# EAGLE board Parallel CS V4.Multiple.Sources (EAGLE 7.2.0)
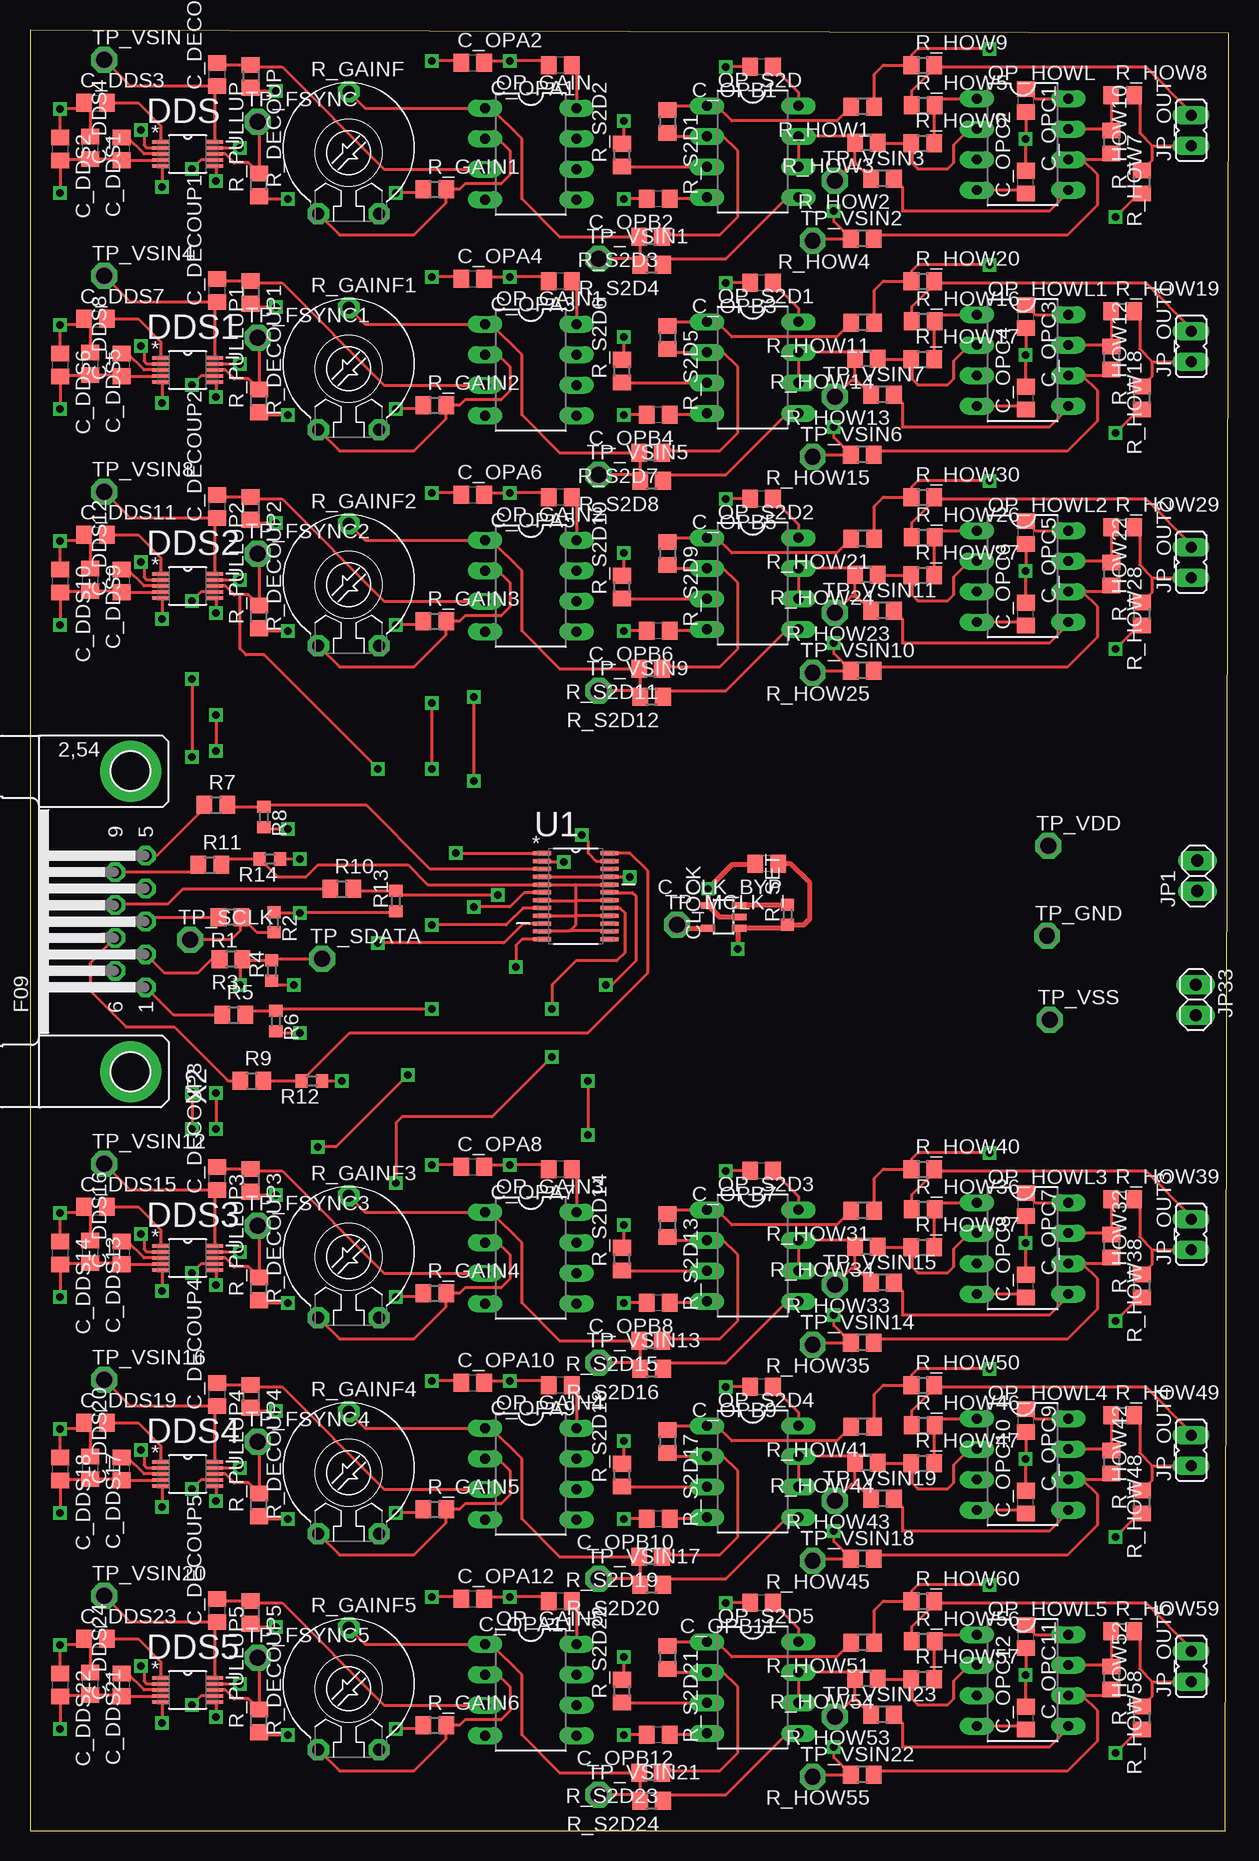
[diagram p0: board, top side]
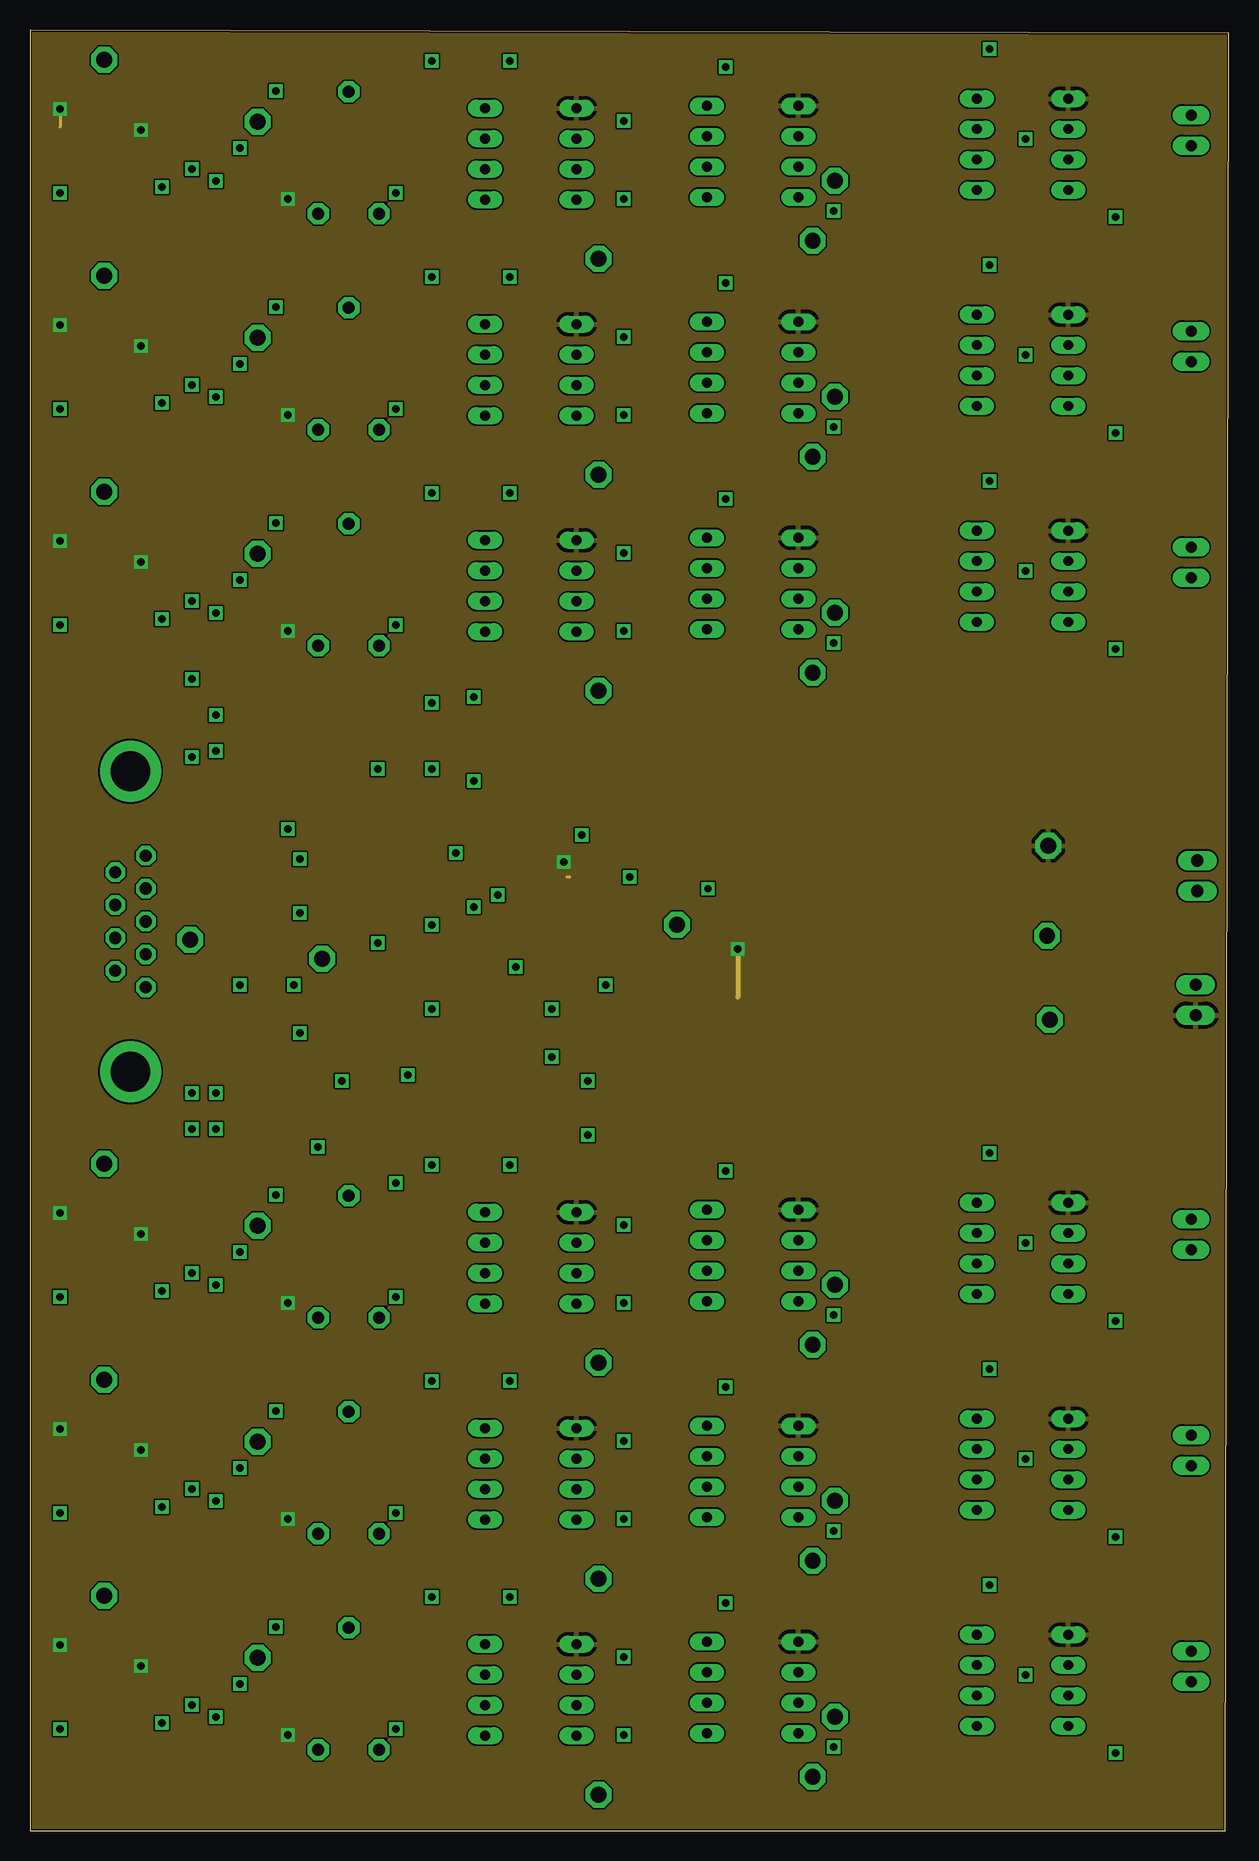
[diagram p1: board, inner layer VDD]
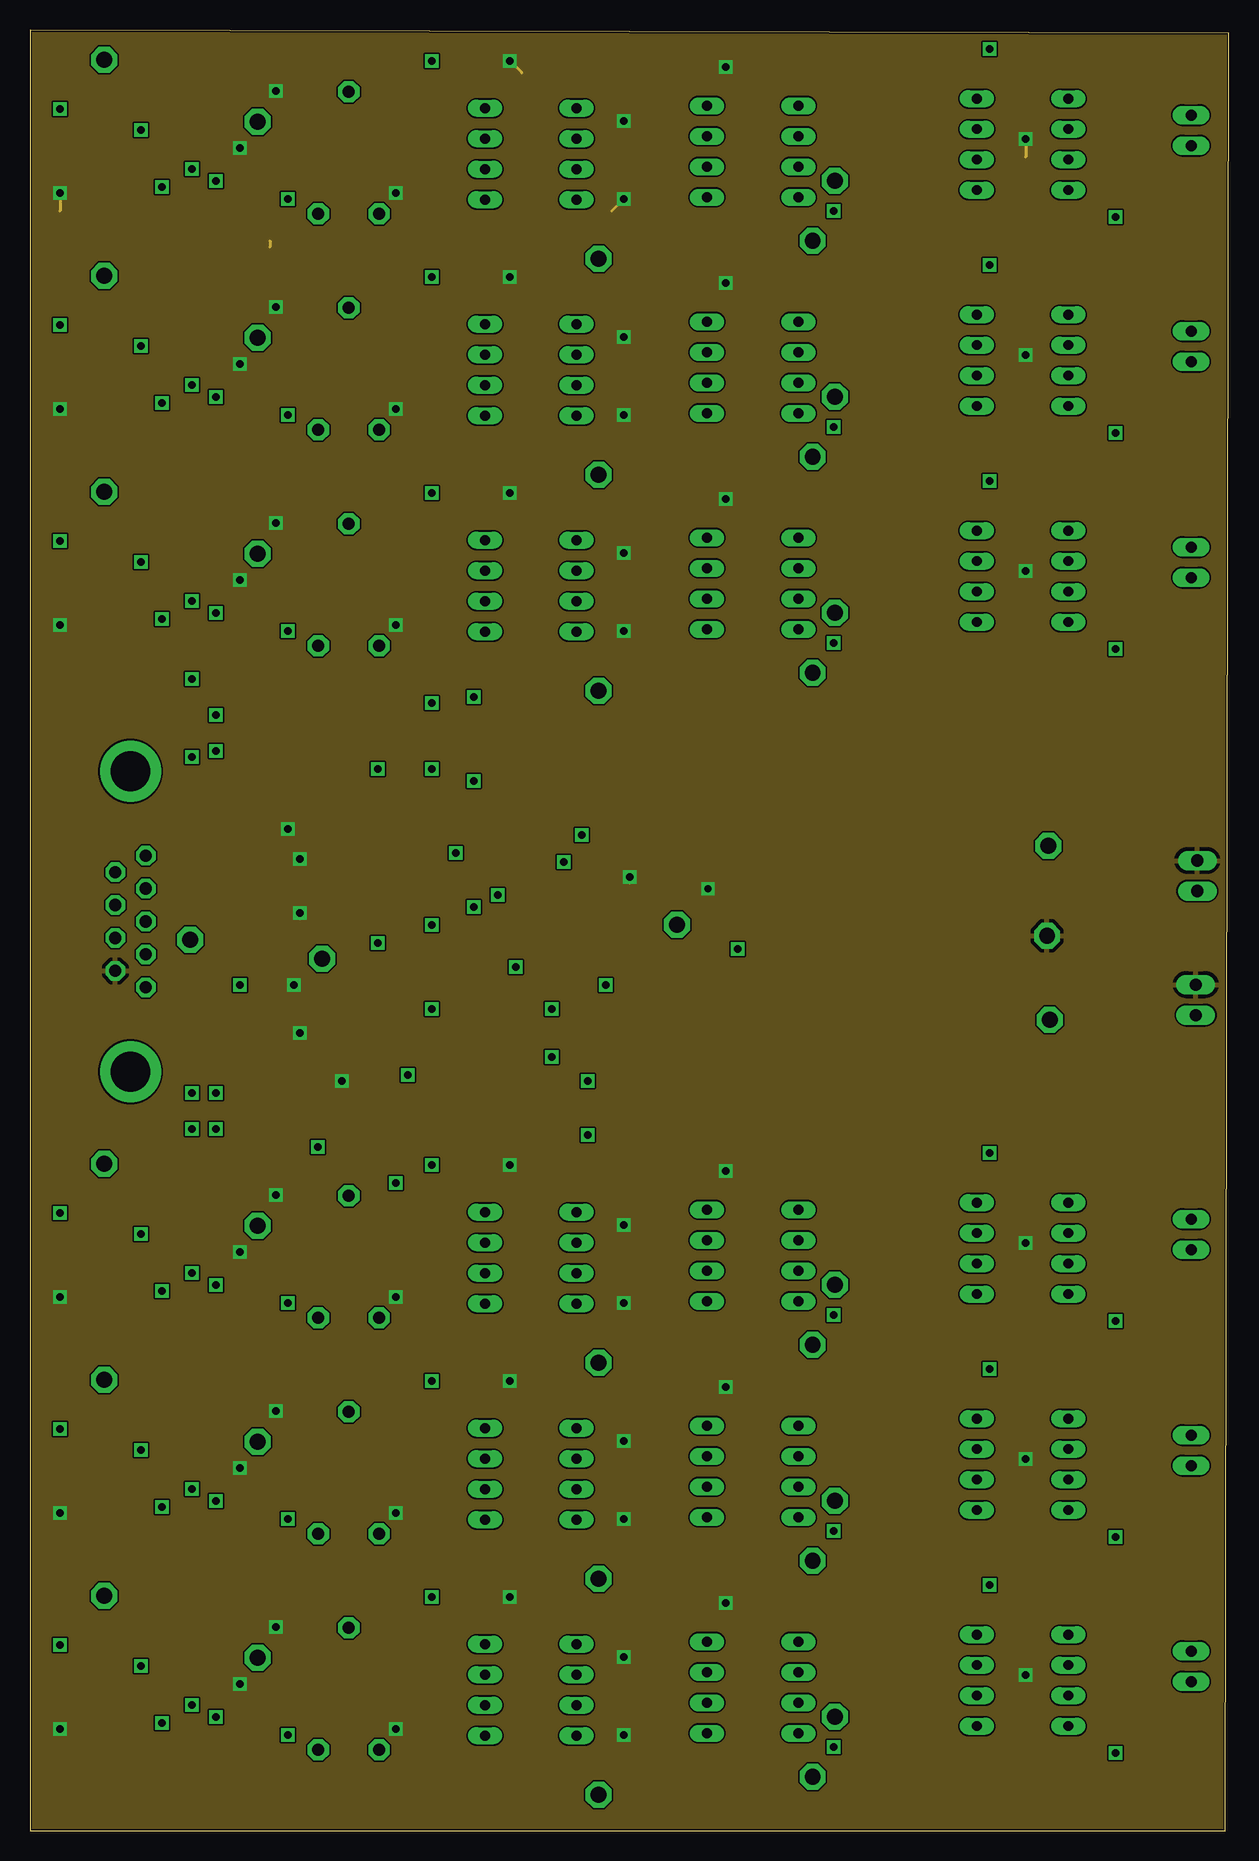
[diagram p2: board, inner layer GND]
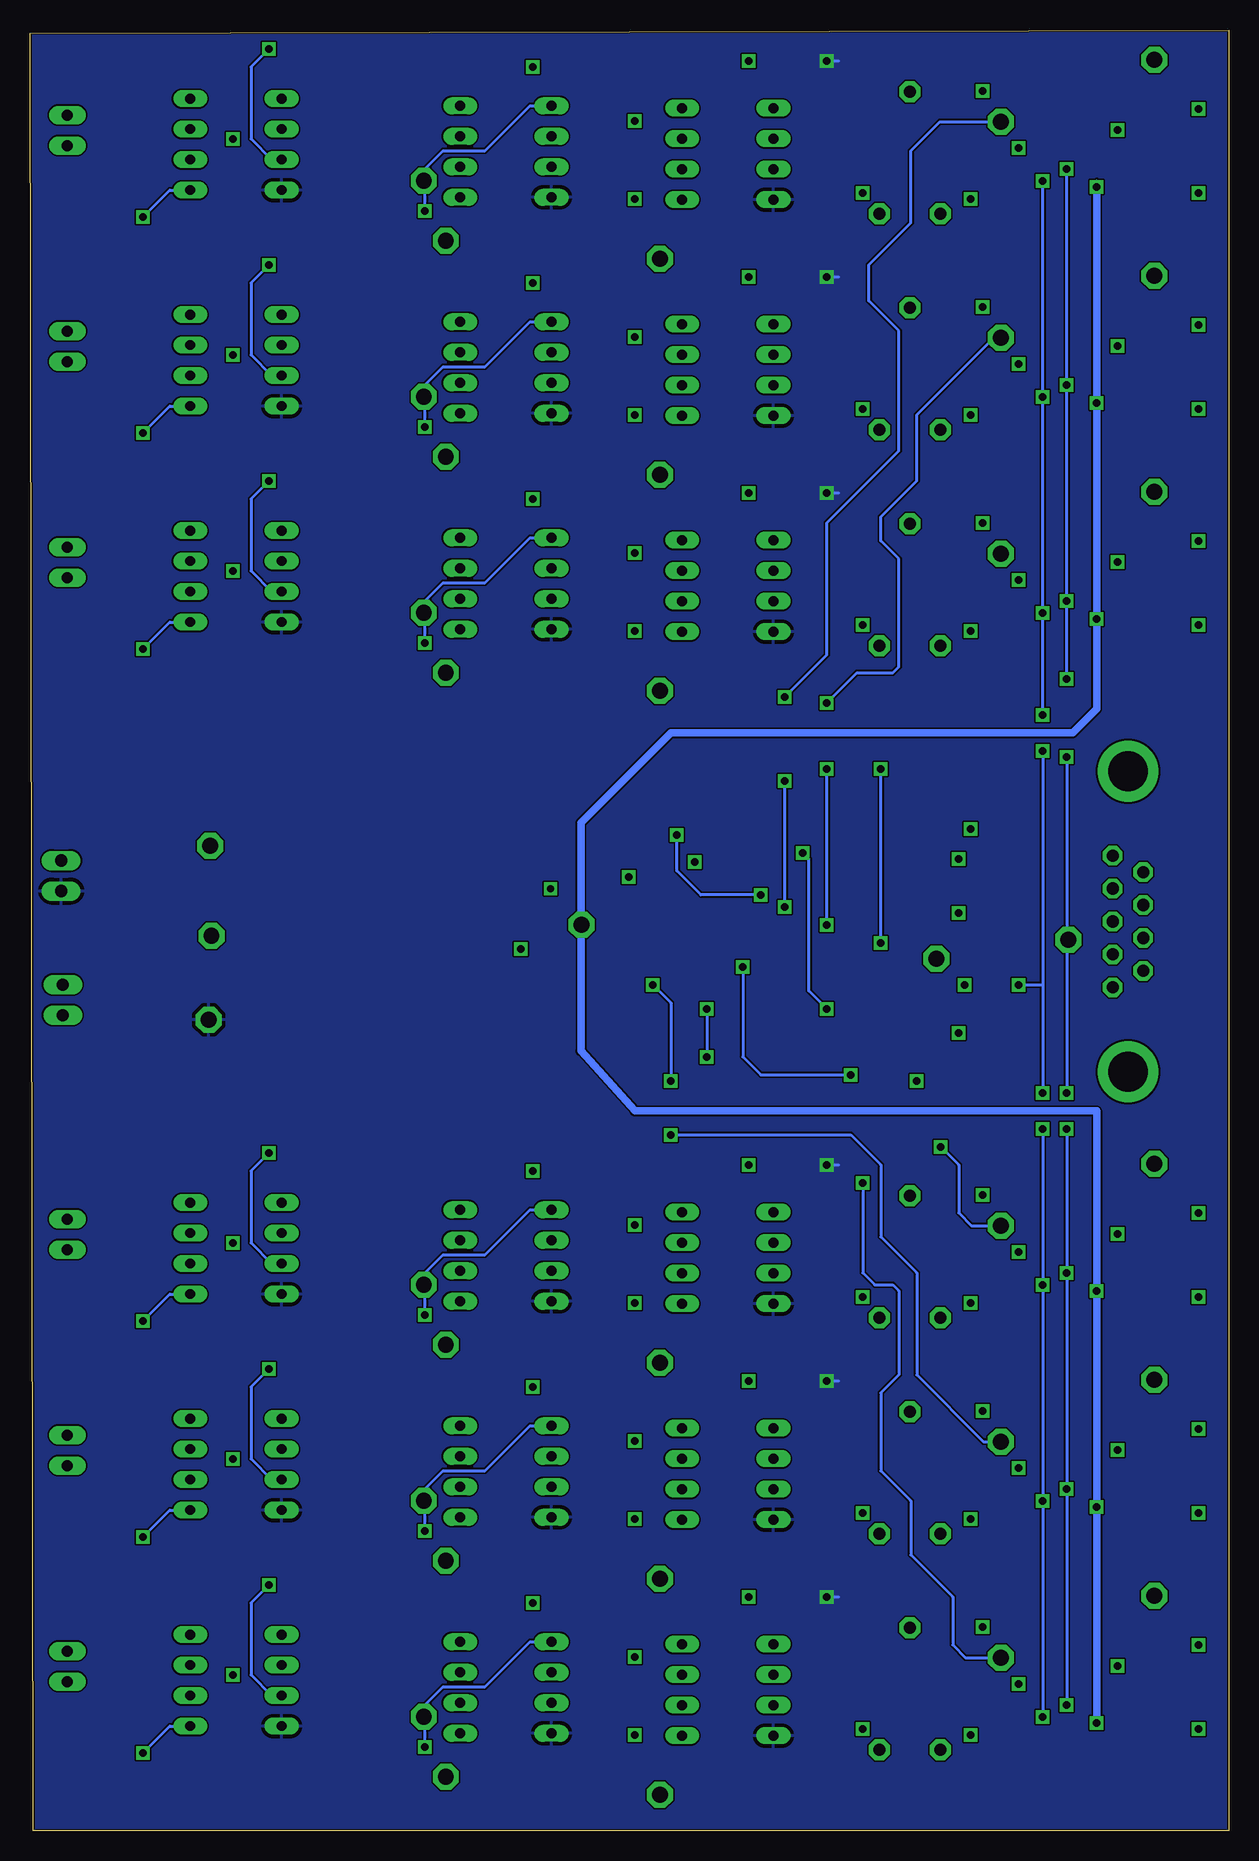
[diagram p3: board, bottom side, seen from below]

Size 99.92 x 150.08 mm. Coordinates in mm from the lower left corner, seen from the top.
Outline: 0,0 99.65,0 99.92,149.81 0,150.08 0,0
Copper layers (1*2*15*16): Top 0.035mm / dielectric 1.5mm / VDD 0.035mm / dielectric 0.15mm / GND 0.035mm / dielectric 0.2mm / Bottom 0.035mm
Design rules "SparkFun-4-layer": minimum track width 6mil, minimum drill 13mil, track to track 6mil, track to pad 6mil, pad to pad 6mil, via to via 6mil, smd to smd 6mil, copper to edge 6mil, drill to drill 8mil, minimum pad ring 12mil, minimum via ring 10mil, stop-mask expansion 4mil, vias tented up to drill 20mil, thermal gap 12mil

## Footprints (pad centres in the part's own frame; a part is rotated, then mirrored left to right if it is on the bottom)
C0805 = smd 1.3 x 1.5: 1 -0.95,0; 2 0.95,0
SOT23-5L = smd 0.55 x 1.2: 1 -0.95,-1.3; 2 0,-1.3; 3 0.95,-1.3; 4 0.95,1.3; 5 -0.95,1.3
SOP50P490X110-10N = smd 1.422 x 0.305: 1 -2.235,0.991; 2 -2.235,0.508; 3 -2.235,0; 4 -2.235,-0.508; 5 -2.235,-0.991; 6 2.235,-0.991; 7 2.235,-0.508; 8 2.235,0; 9 2.235,0.508; 10 2.235,0.991
1X02 = drill 1.016 long: 1 -1.27,0; 2 1.27,0
JP1 = drill 0.914 long: 1 0,-1.27; 2 0,1.27
DIL08 = drill 0.813 long: 1 -3.81,-3.81; 2 -1.27,-3.81; 3 1.27,-3.81; 4 3.81,-3.81; 5 3.81,3.81; 6 1.27,3.81; 7 -1.27,3.81; 8 -3.81,3.81
R0805 = smd 1.3 x 1.5: 1 -0.95,0; 2 0.95,0
R0603 = smd 1 x 1.1: 1 -0.85,0; 2 0.85,0
PT-10 = drill 1.016 pad 1.778 octagon: 1 -2.54,-5.08; 2 2.54,-5.08; 3 0,5.08
P1-13 = drill 1.321 pad 2.159 octagon: TP 0,0
SOP65P640X120-24N = smd 1.473 x 0.356: 1 -2.819,3.581; 2 -2.819,2.921; 3 -2.819,2.286; 4 -2.819,1.626; 5 -2.819,0.965; 6 -2.819,0.33; 7 -2.819,-0.33; 8 -2.819,-0.965; 9 -2.819,-1.626; 10 -2.819,-2.286; 11 -2.819,-2.921; 12 -2.819,-3.581; 13 2.819,-3.581; 14 2.819,-2.921; 15 2.819,-2.286; 16 2.819,-1.626; 17 2.819,-0.965; 18 2.819,-0.33; 19 2.819,0.33; 20 2.819,0.965; 21 2.819,1.626; 22 2.819,2.286; 23 2.819,2.921; 24 2.819,3.581
F09HP = drill 1.016 octagon: 1 -5.486,-1.27; 2 -2.743,-1.27; 3 0,-1.27; 4 2.743,-1.27; 5 5.486,-1.27; 6 -4.115,1.27; 7 -1.372,1.27; 8 1.372,1.27; 9 4.115,1.27 | drill 3.302 pad 5.08: G1 -12.522,0; G2 12.522,0

## Placement (x,y rotation side)
C_CLK_BYP  0.1u  [C0805]  61.42,80.59 180 top
C_DDS1  0.1u  [C0805]  5,140.27 270 top
C_DDS2  10u  [C0805]  2.5,140.16 270 top
C_DDS3  10n  [C0805]  5.45,144 0 top
C_DDS4  100n  [C0805]  7.65,140.18 90 top
C_DDS5  0.1u  [C0805]  5,122.27 270 top
C_DDS6  10u  [C0805]  2.5,122.16 270 top
C_DDS7  10n  [C0805]  5.45,126 0 top
C_DDS8  100n  [C0805]  7.65,122.18 90 top
C_DDS9  0.1u  [C0805]  5,104.27 270 top
C_DDS10  10u  [C0805]  2.5,104.16 270 top
C_DDS11  10n  [C0805]  5.45,108 0 top
C_DDS12  100n  [C0805]  7.65,104.18 90 top
C_DDS13  0.1u  [C0805]  5,48.27 270 top
C_DDS14  10u  [C0805]  2.5,48.16 270 top
C_DDS15  10n  [C0805]  5.45,52 0 top
C_DDS16  100n  [C0805]  7.65,48.18 90 top
C_DDS17  0.1u  [C0805]  5,30.27 270 top
C_DDS18  10u  [C0805]  2.5,30.16 270 top
C_DDS19  10n  [C0805]  5.45,34 0 top
C_DDS20  100n  [C0805]  7.65,30.18 90 top
C_DDS21  0.1u  [C0805]  5,12.27 270 top
C_DDS22  10u  [C0805]  2.5,12.16 270 top
C_DDS23  10n  [C0805]  5.45,16 0 top
C_DDS24  100n  [C0805]  7.65,12.18 90 top
C_DECOUP  1u  [C0805]  15.59,146.38 90 top
C_DECOUP1  1u  [C0805]  15.59,128.38 90 top
C_DECOUP2  1u  [C0805]  15.59,110.38 90 top
C_DECOUP3  1u  [C0805]  15.59,54.38 90 top
C_DECOUP4  1u  [C0805]  15.59,36.38 90 top
C_DECOUP5  1u  [C0805]  15.59,18.38 90 top
C_OPA1  0.1u  [C0805]  44.21,147.15 180 top
C_OPA2  0.1u  [C0805]  36.9,147.35 0 top
C_OPA3  0.1u  [C0805]  44.21,129.15 180 top
C_OPA4  0.1u  [C0805]  36.9,129.35 0 top
C_OPA5  0.1u  [C0805]  44.21,111.15 180 top
C_OPA6  0.1u  [C0805]  36.9,111.35 0 top
C_OPA7  0.1u  [C0805]  44.21,55.15 180 top
C_OPA8  0.1u  [C0805]  36.9,55.35 0 top
C_OPA9  0.1u  [C0805]  44.21,37.15 180 top
C_OPA10  0.1u  [C0805]  36.9,37.35 0 top
C_OPA11  0.1u  [C0805]  44.21,19.15 180 top
C_OPA12  0.1u  [C0805]  36.9,19.35 0 top
C_OPB1  0.1u  [C0805]  60.99,147 180 top
C_OPB2  0.1u  [C0805]  52.38,136 180 top
C_OPB3  0.1u  [C0805]  60.99,129 180 top
C_OPB4  0.1u  [C0805]  52.38,118 180 top
C_OPB5  0.1u  [C0805]  60.99,111 180 top
C_OPB6  0.1u  [C0805]  52.38,100 180 top
C_OPB7  0.1u  [C0805]  60.99,55 180 top
C_OPB8  0.1u  [C0805]  52.38,44 180 top
C_OPB9  0.1u  [C0805]  60.99,37 180 top
C_OPB10  0.1u  [C0805]  52.38,26 180 top
C_OPB11  0.1u  [C0805]  60.99,19 180 top
C_OPB12  0.1u  [C0805]  52.38,8 180 top
C_OPC1  0.1u  [C0805]  83,144.21 270 top
C_OPC2  0.1u  [C0805]  83,137.4 90 top
C_OPC3  0.1u  [C0805]  83,126.21 270 top
C_OPC4  0.1u  [C0805]  83,119.4 90 top
C_OPC5  0.1u  [C0805]  83,108.21 270 top
C_OPC6  0.1u  [C0805]  83,101.4 90 top
C_OPC7  0.1u  [C0805]  83,52.21 270 top
C_OPC8  0.1u  [C0805]  83,45.4 90 top
C_OPC9  0.1u  [C0805]  83,34.21 270 top
C_OPC10  0.1u  [C0805]  83,27.4 90 top
C_OPC11  0.1u  [C0805]  83,16.21 270 top
C_OPC12  0.1u  [C0805]  83,9.4 90 top
CLOCK  LTC69000  [SOT23-5L]  57.82,76.18 90 top
DDS  AD9833BRMZ  [SOP50P490X110-10N]  13.15,139.75 0 top
DDS1  AD9833BRMZ  [SOP50P490X110-10N]  13.15,121.75 0 top
DDS2  AD9833BRMZ  [SOP50P490X110-10N]  13.15,103.75 0 top
DDS3  AD9833BRMZ  [SOP50P490X110-10N]  13.15,47.75 0 top
DDS4  AD9833BRMZ  [SOP50P490X110-10N]  13.15,29.75 0 top
DDS5  AD9833BRMZ  [SOP50P490X110-10N]  13.15,11.75 0 top
JP1  PWR  [1X02]  97.32,79.6 90 top
JP33  PWR  [1X02]  97.18,69.25 270 top
JP_OUT  [JP1]  96.8,141.71 0 top
JP_OUT1  [JP1]  96.8,123.71 0 top
JP_OUT2  [JP1]  96.8,105.71 0 top
JP_OUT3  [JP1]  96.8,49.71 0 top
JP_OUT4  [JP1]  96.8,31.71 0 top
JP_OUT5  [JP1]  96.8,13.71 0 top
OP_GAIN  RC4560  [DIL08]  41.75,139.75 270 top
OP_GAIN1  RC4560  [DIL08]  41.75,121.75 270 top
OP_GAIN2  RC4560  [DIL08]  41.75,103.75 270 top
OP_GAIN3  RC4560  [DIL08]  41.75,47.75 270 top
OP_GAIN4  RC4560  [DIL08]  41.75,29.75 270 top
OP_GAIN5  RC4560  [DIL08]  41.75,11.75 270 top
OP_HOWL  RC4560  [DIL08]  82.75,140.55 270 top
OP_HOWL1  RC4560  [DIL08]  82.75,122.55 270 top
OP_HOWL2  RC4560  [DIL08]  82.75,104.55 270 top
OP_HOWL3  RC4560  [DIL08]  82.75,48.55 270 top
OP_HOWL4  RC4560  [DIL08]  82.75,30.55 270 top
OP_HOWL5  RC4560  [DIL08]  82.75,12.55 270 top
OP_S2D  RC4560  [DIL08]  60.25,139.95 270 top
OP_S2D1  RC4560  [DIL08]  60.25,121.95 270 top
OP_S2D2  RC4560  [DIL08]  60.25,103.95 270 top
OP_S2D3  RC4560  [DIL08]  60.25,47.95 270 top
OP_S2D4  RC4560  [DIL08]  60.25,29.95 270 top
OP_S2D5  RC4560  [DIL08]  60.25,11.95 270 top
R1  10k  [R0805]  16.68,76.15 180 top
R2  20k  [R0603]  20.35,75.73 270 top
R3  10k  [R0805]  16.76,72.65 180 top
R4  20k  [R0603]  20.15,71.69 90 top
R5  10k  [R0805]  17,68 0 top
R6  20k  [R0603]  20.5,67.5 270 top
R7  10k  [R0805]  15.5,85.5 0 top
R8  20k  [R0603]  19.5,84.5 270 top
R9  10k  [R0805]  18.5,62.5 0 top
R10  10k  [R0805]  26,78.5 0 top
R11  10k  [R0805]  15,80.5 0 top
R12  20k  [R0603]  23.5,62.5 180 top
R13  20k  [R0603]  30.5,77.5 90 top
R14  20k  [R0603]  20,81 180 top
R_DECOUP  10k  [R0805]  18.41,146.22 270 top
R_DECOUP1  10k  [R0805]  18.41,128.22 270 top
R_DECOUP2  10k  [R0805]  18.41,110.22 270 top
R_DECOUP3  10k  [R0805]  18.41,54.22 270 top
R_DECOUP4  10k  [R0805]  18.41,36.22 270 top
R_DECOUP5  10k  [R0805]  18.41,18.22 270 top
R_GAIN1  10k  [R0805]  33.75,136.8 0 top
R_GAIN2  10k  [R0805]  33.75,118.8 0 top
R_GAIN3  10k  [R0805]  33.75,100.8 0 top
R_GAIN4  10k  [R0805]  33.75,44.8 0 top
R_GAIN5  10k  [R0805]  33.75,26.8 0 top
R_GAIN6  10k  [R0805]  33.75,8.8 0 top
R_GAINF  [PT-10]  26.57,139.85 0 top
R_GAINF1  [PT-10]  26.57,121.85 0 top
R_GAINF2  [PT-10]  26.57,103.85 0 top
R_GAINF3  [PT-10]  26.57,47.85 0 top
R_GAINF4  [PT-10]  26.57,29.85 0 top
R_GAINF5  [PT-10]  26.57,11.85 0 top
R_HOW1  100k  [R0805]  69.41,143.7 180 top
R_HOW2  100k  [R0805]  71.07,137.7 180 top
R_HOW3  100k  [R0805]  69.73,140.7 180 top
R_HOW4  100k  [R0805]  69.39,132.7 180 top
R_HOW5  1k  [R0805]  74.45,143.8 0 top
R_HOW6  100k  [R0805]  74.41,140.65 0 top
R_HOW7  100k  [R0805]  90.15,140.75 270 top
R_HOW8  1k  [R0805]  91.09,144.65 0 top
R_HOW9  100k  [R0805]  74.43,147.15 0 top
R_HOW10  100k  [R0805]  92.7,137.41 90 top
R_HOW11  100k  [R0805]  69.41,125.7 180 top
R_HOW12  100k  [R0805]  92.7,119.41 90 top
R_HOW13  100k  [R0805]  71.07,119.7 180 top
R_HOW14  100k  [R0805]  69.73,122.7 180 top
R_HOW15  100k  [R0805]  69.39,114.7 180 top
R_HOW16  1k  [R0805]  74.45,125.8 0 top
R_HOW17  100k  [R0805]  74.41,122.65 0 top
R_HOW18  100k  [R0805]  90.15,122.75 270 top
R_HOW19  1k  [R0805]  91.09,126.65 0 top
R_HOW20  100k  [R0805]  74.43,129.15 0 top
R_HOW21  100k  [R0805]  69.41,107.7 180 top
R_HOW22  100k  [R0805]  92.7,101.41 90 top
R_HOW23  100k  [R0805]  71.07,101.7 180 top
R_HOW24  100k  [R0805]  69.73,104.7 180 top
R_HOW25  100k  [R0805]  69.39,96.7 180 top
R_HOW26  1k  [R0805]  74.45,107.8 0 top
R_HOW27  100k  [R0805]  74.41,104.65 0 top
R_HOW28  100k  [R0805]  90.15,104.75 270 top
R_HOW29  1k  [R0805]  91.09,108.65 0 top
R_HOW30  100k  [R0805]  74.43,111.15 0 top
R_HOW31  100k  [R0805]  69.41,51.7 180 top
R_HOW32  100k  [R0805]  92.7,45.41 90 top
R_HOW33  100k  [R0805]  71.07,45.7 180 top
R_HOW34  100k  [R0805]  69.73,48.7 180 top
R_HOW35  100k  [R0805]  69.39,40.7 180 top
R_HOW36  1k  [R0805]  74.45,51.8 0 top
R_HOW37  100k  [R0805]  74.41,48.65 0 top
R_HOW38  100k  [R0805]  90.15,48.75 270 top
R_HOW39  1k  [R0805]  91.09,52.65 0 top
R_HOW40  100k  [R0805]  74.43,55.15 0 top
R_HOW41  100k  [R0805]  69.41,33.7 180 top
R_HOW42  100k  [R0805]  92.7,27.41 90 top
R_HOW43  100k  [R0805]  71.07,27.7 180 top
R_HOW44  100k  [R0805]  69.73,30.7 180 top
R_HOW45  100k  [R0805]  69.39,22.7 180 top
R_HOW46  1k  [R0805]  74.45,33.8 0 top
R_HOW47  100k  [R0805]  74.41,30.65 0 top
R_HOW48  100k  [R0805]  90.15,30.75 270 top
R_HOW49  1k  [R0805]  91.09,34.65 0 top
R_HOW50  100k  [R0805]  74.43,37.15 0 top
R_HOW51  100k  [R0805]  69.41,15.7 180 top
R_HOW52  100k  [R0805]  92.7,9.41 90 top
R_HOW53  100k  [R0805]  71.07,9.7 180 top
R_HOW54  100k  [R0805]  69.73,12.7 180 top
R_HOW55  100k  [R0805]  69.39,4.7 180 top
R_HOW56  1k  [R0805]  74.45,15.8 0 top
R_HOW57  100k  [R0805]  74.41,12.65 0 top
R_HOW58  100k  [R0805]  90.15,12.75 270 top
R_HOW59  1k  [R0805]  91.09,16.65 0 top
R_HOW60  100k  [R0805]  74.43,19.15 0 top
R_PULLUP  10k  [R0805]  19.09,137.18 90 top
R_PULLUP1  10k  [R0805]  19.09,119.18 90 top
R_PULLUP2  10k  [R0805]  19.09,101.18 90 top
R_PULLUP3  10k  [R0805]  19.09,45.18 90 top
R_PULLUP4  10k  [R0805]  19.09,27.18 90 top
R_PULLUP5  10k  [R0805]  19.09,9.18 90 top
R_S2D1  10k  [R0805]  53.15,142.46 270 top
R_S2D2  10k  [R0805]  49.35,139.65 90 top
R_S2D3  10k  [R0805]  51.74,132.85 180 top
R_S2D4  10k  [R0805]  51.82,130.5 180 top
R_S2D5  10k  [R0805]  53.15,124.46 270 top
R_S2D6  10k  [R0805]  49.35,121.65 90 top
R_S2D7  10k  [R0805]  51.74,114.85 180 top
R_S2D8  10k  [R0805]  51.82,112.5 180 top
R_S2D9  10k  [R0805]  53.15,106.46 270 top
R_S2D10  10k  [R0805]  49.35,103.65 90 top
R_S2D11  10k  [R0805]  51.74,96.85 180 top
R_S2D12  10k  [R0805]  51.82,94.5 180 top
R_S2D13  10k  [R0805]  53.15,50.46 270 top
R_S2D14  10k  [R0805]  49.35,47.65 90 top
R_S2D15  10k  [R0805]  51.74,40.85 180 top
R_S2D16  10k  [R0805]  51.82,38.5 180 top
R_S2D17  10k  [R0805]  53.15,32.46 270 top
R_S2D18  10k  [R0805]  49.35,29.65 90 top
R_S2D19  10k  [R0805]  51.74,22.85 180 top
R_S2D20  10k  [R0805]  51.82,20.5 180 top
R_S2D21  10k  [R0805]  53.15,14.46 270 top
R_S2D22  10k  [R0805]  49.35,11.65 90 top
R_S2D23  10k  [R0805]  51.74,4.85 180 top
R_S2D24  10k  [R0805]  51.82,2.5 180 top
R_SET  20k  [R0603]  63.15,76.35 90 top
TP_FSYNC  PTR1PAD1-13  [P1-13]  18.97,142.43 0 top
TP_FSYNC1  PTR1PAD1-13  [P1-13]  18.97,124.43 0 top
TP_FSYNC2  PTR1PAD1-13  [P1-13]  18.97,106.43 0 top
TP_FSYNC3  PTR1PAD1-13  [P1-13]  18.97,50.43 0 top
TP_FSYNC4  PTR1PAD1-13  [P1-13]  18.97,32.43 0 top
TP_FSYNC5  PTR1PAD1-13  [P1-13]  18.97,14.43 0 top
TP_GND  PTR1PAD1-13  [P1-13]  84.79,74.59 0 top
TP_MCLK  PTR1PAD1-13  [P1-13]  53.93,75.51 0 top
TP_SCLK  PTR1PAD1-13  [P1-13]  13.36,74.26 0 top
TP_SDATA  PTR1PAD1-13  [P1-13]  24.36,72.68 0 top
TP_VDD  PTR1PAD1-13  [P1-13]  84.9,82.09 0 top
TP_VSIN  PTR1PAD1-13  [P1-13]  6.18,147.59 0 top
TP_VSIN1  PTR1PAD1-13  [P1-13]  47.41,131.01 0 top
TP_VSIN2  PTR1PAD1-13  [P1-13]  65.25,132.51 0 top
TP_VSIN3  PTR1PAD1-13  [P1-13]  67.09,137.51 0 top
TP_VSIN4  PTR1PAD1-13  [P1-13]  6.18,129.59 0 top
TP_VSIN5  PTR1PAD1-13  [P1-13]  47.41,113.01 0 top
TP_VSIN6  PTR1PAD1-13  [P1-13]  65.25,114.51 0 top
TP_VSIN7  PTR1PAD1-13  [P1-13]  67.09,119.51 0 top
TP_VSIN8  PTR1PAD1-13  [P1-13]  6.18,111.59 0 top
TP_VSIN9  PTR1PAD1-13  [P1-13]  47.41,95.01 0 top
TP_VSIN10  PTR1PAD1-13  [P1-13]  65.25,96.51 0 top
TP_VSIN11  PTR1PAD1-13  [P1-13]  67.09,101.51 0 top
TP_VSIN12  PTR1PAD1-13  [P1-13]  6.18,55.59 0 top
TP_VSIN13  PTR1PAD1-13  [P1-13]  47.41,39.01 0 top
TP_VSIN14  PTR1PAD1-13  [P1-13]  65.25,40.51 0 top
TP_VSIN15  PTR1PAD1-13  [P1-13]  67.09,45.51 0 top
TP_VSIN16  PTR1PAD1-13  [P1-13]  6.18,37.59 0 top
TP_VSIN17  PTR1PAD1-13  [P1-13]  47.41,21.01 0 top
TP_VSIN18  PTR1PAD1-13  [P1-13]  65.25,22.51 0 top
TP_VSIN19  PTR1PAD1-13  [P1-13]  67.09,27.51 0 top
TP_VSIN20  PTR1PAD1-13  [P1-13]  6.18,19.59 0 top
TP_VSIN21  PTR1PAD1-13  [P1-13]  47.41,3.01 0 top
TP_VSIN22  PTR1PAD1-13  [P1-13]  65.25,4.51 0 top
TP_VSIN23  PTR1PAD1-13  [P1-13]  67.09,9.51 0 top
TP_VSS  PTR1PAD1-13  [P1-13]  85.01,67.59 0 top
U1  ADG714BRUZ  [SOP65P640X120-24N]  45.5,77.89 0 top
X2  CTR_ARD  [F09HP]  8.38,75.79 90 top

## Library data of the parts
C_CLK_BYP C_DDS1-C_DDS24 C_DECOUP C_DECOUP1-C_DECOUP5 C_OPA1-C_OPA12 C_OPB1-C_OPB12 C_OPC1-C_OPC12 R1-R14 R_SET = resistor
CLOCK = LTC6900
DDS DDS1-DDS5 = ad9833; MPN: AD9833BRMZ; OC_FARNELL: 1581966; OC_NEWARK: 19M1014; PACKAGE: MSOP-10; SUPPLIER: Analog Devices
JP1 JP33 = pinhead
JP_OUT JP_OUT1-JP_OUT5 = jumper
OP_GAIN OP_GAIN1-OP_GAIN5 OP_HOWL OP_HOWL1-OP_HOWL5 OP_S2D OP_S2D1-OP_S2D5 = RC4560
R_DECOUP R_DECOUP1-R_DECOUP5 R_GAIN1-R_GAIN6 R_GAINF R_GAINF1-R_GAINF5 R_HOW1-R_HOW60 R_PULLUP R_PULLUP1-R_PULLUP5 R_S2D1-R_S2D24 = rcl
TP_FSYNC TP_FSYNC1-TP_FSYNC5 TP_GND TP_MCLK TP_SCLK TP_SDATA TP_VDD TP_VSIN TP_VSIN1-TP_VSIN23 TP_VSS = testpad
U1 = SwitchBoard; MPN: ADG714BRUZ; OC_FARNELL: 9604367; OC_NEWARK: 59K1531; PACKAGE: TSSOP-24; SUPPLIER: Analog Devices
X2 = con-subd; OC_FARNELL: unknown; OC_NEWARK: unknown

## Nets
CLK_OUT: CLOCK.5 DDS.5 TP_MCLK.TP
COMP: C_DDS3.2 DDS.1
COMP1: C_DDS7.2 DDS1.1
COMP2: C_DDS11.2 DDS2.1
COMP3: C_DDS15.2 DDS3.1
COMP4: C_DDS19.2 DDS4.1
COMP5: C_DDS23.2 DDS5.1
DDS_SCLK: DDS.7 R1.1 R2.2 TP_SCLK.TP
DDS_SCLK1: DDS1.7
DDS_SCLK2: DDS2.7
DDS_SCLK3: DDS3.7
DDS_SCLK4: DDS4.7
DDS_SCLK5: DDS5.7
DDS_SCLK_5V: R1.2 X2.3
DDS_SDATA: DDS.6 R3.1 R4.2 TP_SDATA.TP
DDS_SDATA1: DDS1.6
DDS_SDATA2: DDS2.6
DDS_SDATA3: DDS3.6
DDS_SDATA4: DDS4.6
DDS_SDATA5: DDS5.6
DDS_SDATA_5V: R3.2 X2.2
FSYNC: DDS.8 R_PULLUP.2 TP_FSYNC.TP
FSYNC1: DDS1.8 R_PULLUP1.2 TP_FSYNC1.TP
FSYNC2: DDS2.8 R_PULLUP2.2 TP_FSYNC2.TP
FSYNC3: DDS3.8 R_PULLUP3.2 TP_FSYNC3.TP
FSYNC4: DDS4.8 R_PULLUP4.2 TP_FSYNC4.TP
FSYNC5: DDS5.8 R_PULLUP5.2 TP_FSYNC5.TP
FSYNC_CS1: U1.6
FSYNC_CS2: U1.8
FSYNC_CS3: U1.10
FSYNC_CS4: U1.12
FSYNC_CS5: U1.13
FSYNC_CS6: U1.15
FSYNC_CS7: U1.17
FSYNC_CS8: U1.19
FSYNC_IN: R11.2 R14.2 U1.5 U1.7 U1.9 U1.11 U1.14 U1.16 U1.18 U1.20
FSYNC_IN_5V: R11.1 X2.9
GND: C_CLK_BYP.2 C_DDS1.2 C_DDS2.2 C_DDS4.1 C_DDS5.2 C_DDS6.2 C_DDS8.1 C_DDS9.2 C_DDS10.2 C_DDS12.1 C_DDS13.2 C_DDS14.2 C_DDS16.1 C_DDS17.2 C_DDS18.2 C_DDS20.1 C_DDS21.2 C_DDS22.2 C_DDS24.1 C_OPA1.2 C_OPA2.2 C_OPA3.2 C_OPA4.2 C_OPA5.2 C_OPA6.2 C_OPA7.2 C_OPA8.2 C_OPA9.2 C_OPA10.2 C_OPA11.2 C_OPA12.2 C_OPB1.2 C_OPB2.2 C_OPB3.2 C_OPB4.2 C_OPB5.2 C_OPB6.2 C_OPB7.2 C_OPB8.2 C_OPB9.2 C_OPB10.2 C_OPB11.2 C_OPB12.2 C_OPC1.2 C_OPC2.2 C_OPC3.2 C_OPC4.2 C_OPC5.2 C_OPC6.2 C_OPC7.2 C_OPC8.2 C_OPC9.2 C_OPC10.2 C_OPC11.2 C_OPC12.2 CLOCK.2 CLOCK.4 DDS1.4 DDS1.9 DDS2.4 DDS2.9 DDS3.4 DDS3.9 DDS4.4 DDS4.9 DDS5.4 DDS5.9 DDS.4 DDS.9 JP1.2 JP33.1 R2.1 R4.1 R6.2 R8.2 R12.1 R13.1 R14.1 R_DECOUP1.2 R_DECOUP2.2 R_DECOUP3.2 R_DECOUP4.2 R_DECOUP5.2 R_DECOUP.2 R_GAIN1.1 R_GAIN2.1 R_GAIN3.1 R_GAIN4.1 R_GAIN5.1 R_GAIN6.1 R_S2D2.2 R_S2D6.2 R_S2D10.2 R_S2D14.2 R_S2D18.2 R_S2D22.2 TP_GND.TP U1.4 U1.21 X2.6
N$1: C_DDS4.2 DDS.3
N$2: CLOCK.3 R_SET.2
N$3: OP_GAIN.1 R_GAINF.3 R_S2D3.2 R_S2D4.2 TP_VSIN1.TP
N$4: OP_S2D.6 OP_S2D.7 R_HOW2.2 R_HOW3.2 TP_VSIN3.TP
N$5: OP_GAIN.2 R_GAIN1.2 R_GAINF.1
N$6: OP_S2D.5 R_S2D4.1
N$7: OP_HOWL.5 R_HOW2.1 R_HOW10.1
N$8: OP_S2D.1 R_HOW1.2 R_HOW4.2 R_S2D1.1 TP_VSIN2.TP
N$9: OP_S2D.3 R_S2D2.1
N$10: OP_S2D.2 R_S2D1.2 R_S2D3.1
N$11: OP_HOWL.3 R_HOW1.1 R_HOW9.1
N$12: OP_HOWL.2 R_HOW3.1 R_HOW6.1
N$13: JP_OUT.2 R_HOW5.1 R_HOW9.2
N$14: JP_OUT.1 R_HOW8.2 R_HOW10.2
N$15: C_DDS8.2 DDS1.3
N$16: OP_HOWL.1 R_HOW5.2 R_HOW6.2
N$17: OP_HOWL.7 R_HOW7.1 R_HOW8.1
N$18: OP_GAIN1.1 R_GAINF1.3 R_S2D7.2 R_S2D8.2 TP_VSIN5.TP
N$19: OP_GAIN1.2 R_GAIN2.2 R_GAINF1.1
N$20: OP_HOWL.6 R_HOW4.1 R_HOW7.2
N$21: OP_S2D1.5 R_S2D8.1
N$22: OP_S2D1.1 R_HOW11.2 R_HOW15.2 R_S2D5.1 TP_VSIN6.TP
N$23: OP_S2D1.3 R_S2D6.1
N$24: OP_S2D1.2 R_S2D5.2 R_S2D7.1
N$25: OP_HOWL1.2 R_HOW14.1 R_HOW17.1
N$26: JP_OUT1.1 R_HOW12.2 R_HOW19.2
N$27: OP_HOWL1.1 R_HOW16.2 R_HOW17.2
N$28: OP_HOWL1.7 R_HOW18.1 R_HOW19.1
N$29: OP_HOWL1.6 R_HOW15.1 R_HOW18.2
N$30: OP_S2D1.6 OP_S2D1.7 R_HOW13.2 R_HOW14.2 TP_VSIN7.TP
N$31: OP_HOWL1.3 R_HOW11.1 R_HOW20.1
N$32: OP_HOWL1.5 R_HOW12.1 R_HOW13.1
N$33: JP_OUT1.2 R_HOW16.1 R_HOW20.2
N$34: C_DDS12.2 DDS2.3
N$35: OP_GAIN2.1 R_GAINF2.3 R_S2D11.2 R_S2D12.2 TP_VSIN9.TP
N$36: OP_GAIN2.2 R_GAIN3.2 R_GAINF2.1
N$37: OP_S2D2.5 R_S2D12.1
N$38: OP_S2D2.1 R_HOW21.2 R_HOW25.2 R_S2D9.1 TP_VSIN10.TP
N$39: OP_S2D2.3 R_S2D10.1
N$40: OP_S2D2.2 R_S2D9.2 R_S2D11.1
N$41: OP_HOWL2.2 R_HOW24.1 R_HOW27.1
N$42: JP_OUT2.1 R_HOW22.2 R_HOW29.2
N$43: OP_HOWL2.1 R_HOW26.2 R_HOW27.2
N$44: OP_HOWL2.7 R_HOW28.1 R_HOW29.1
N$45: OP_HOWL2.6 R_HOW25.1 R_HOW28.2
N$46: OP_S2D2.6 OP_S2D2.7 R_HOW23.2 R_HOW24.2 TP_VSIN11.TP
N$47: OP_HOWL2.3 R_HOW21.1 R_HOW30.1
N$48: OP_HOWL2.5 R_HOW22.1 R_HOW23.1
N$49: JP_OUT2.2 R_HOW26.1 R_HOW30.2
N$50: C_DDS16.2 DDS3.3
N$51: OP_GAIN3.1 R_GAINF3.3 R_S2D15.2 R_S2D16.2 TP_VSIN13.TP
N$52: OP_GAIN3.2 R_GAIN4.2 R_GAINF3.1
N$53: OP_S2D3.5 R_S2D16.1
N$54: OP_S2D3.1 R_HOW31.2 R_HOW35.2 R_S2D13.1 TP_VSIN14.TP
N$55: OP_S2D3.3 R_S2D14.1
N$56: OP_S2D3.2 R_S2D13.2 R_S2D15.1
N$57: OP_HOWL3.2 R_HOW34.1 R_HOW37.1
N$58: JP_OUT3.1 R_HOW32.2 R_HOW39.2
N$59: OP_HOWL3.1 R_HOW36.2 R_HOW37.2
N$60: OP_HOWL3.7 R_HOW38.1 R_HOW39.1
N$61: OP_HOWL3.6 R_HOW35.1 R_HOW38.2
N$62: OP_S2D3.6 OP_S2D3.7 R_HOW33.2 R_HOW34.2 TP_VSIN15.TP
N$63: OP_HOWL3.3 R_HOW31.1 R_HOW40.1
N$64: OP_HOWL3.5 R_HOW32.1 R_HOW33.1
N$65: JP_OUT3.2 R_HOW36.1 R_HOW40.2
N$66: C_DDS20.2 DDS4.3
N$67: OP_GAIN4.1 R_GAINF4.3 R_S2D19.2 R_S2D20.2 TP_VSIN17.TP
N$68: OP_GAIN4.2 R_GAIN5.2 R_GAINF4.1
N$69: OP_S2D4.5 R_S2D20.1
N$70: OP_S2D4.1 R_HOW41.2 R_HOW45.2 R_S2D17.1 TP_VSIN18.TP
N$71: OP_S2D4.3 R_S2D18.1
N$72: OP_S2D4.2 R_S2D17.2 R_S2D19.1
N$73: OP_HOWL4.2 R_HOW44.1 R_HOW47.1
N$74: JP_OUT4.1 R_HOW42.2 R_HOW49.2
N$75: OP_HOWL4.1 R_HOW46.2 R_HOW47.2
N$76: OP_HOWL4.7 R_HOW48.1 R_HOW49.1
N$77: OP_HOWL4.6 R_HOW45.1 R_HOW48.2
N$78: OP_S2D4.6 OP_S2D4.7 R_HOW43.2 R_HOW44.2 TP_VSIN19.TP
N$79: OP_HOWL4.3 R_HOW41.1 R_HOW50.1
N$80: OP_HOWL4.5 R_HOW42.1 R_HOW43.1
N$81: JP_OUT4.2 R_HOW46.1 R_HOW50.2
N$82: C_DDS24.2 DDS5.3
N$83: OP_GAIN5.1 R_GAINF5.3 R_S2D23.2 R_S2D24.2 TP_VSIN21.TP
N$84: OP_GAIN5.2 R_GAIN6.2 R_GAINF5.1
N$85: OP_S2D5.5 R_S2D24.1
N$86: OP_S2D5.1 R_HOW51.2 R_HOW55.2 R_S2D21.1 TP_VSIN22.TP
N$87: OP_S2D5.3 R_S2D22.1
N$88: OP_S2D5.2 R_S2D21.2 R_S2D23.1
N$89: OP_HOWL5.2 R_HOW54.1 R_HOW57.1
N$90: JP_OUT5.1 R_HOW52.2 R_HOW59.2
N$91: OP_HOWL5.1 R_HOW56.2 R_HOW57.2
N$92: OP_HOWL5.7 R_HOW58.1 R_HOW59.1
N$93: OP_HOWL5.6 R_HOW55.1 R_HOW58.2
N$94: OP_S2D5.6 OP_S2D5.7 R_HOW53.2 R_HOW54.2 TP_VSIN23.TP
N$95: OP_HOWL5.3 R_HOW51.1 R_HOW60.1
N$96: OP_HOWL5.5 R_HOW52.1 R_HOW53.1
N$97: JP_OUT5.2 R_HOW56.1 R_HOW60.2
S$2: DDS1.5
S$3: DDS2.5
S$4: DDS3.5
S$5: DDS4.5
S$6: DDS5.5
SW_DIN: R7.2 R8.1 U1.3
SW_DIN_5V: R7.1 X2.5
SW_SCLK: R5.2 R6.1 U1.1
SW_SCLK_5V: R5.1 X2.1
SW_~RESET: R10.2 R13.2 U1.23
SW_~RESET_5V: R10.1 X2.8
SW_~SYNC: R9.2 R12.2 U1.24
SW_~SYNC_5V: R9.1 X2.7
VDD: C_CLK_BYP.1 C_DDS1.1 C_DDS2.1 C_DDS3.1 C_DDS5.1 C_DDS6.1 C_DDS7.1 C_DDS9.1 C_DDS10.1 C_DDS11.1 C_DDS13.1 C_DDS14.1 C_DDS15.1 C_DDS17.1 C_DDS18.1 C_DDS19.1 C_DDS21.1 C_DDS22.1 C_DDS23.1 C_OPA1.1 C_OPA3.1 C_OPA5.1 C_OPA7.1 C_OPA9.1 C_OPA11.1 C_OPB1.1 C_OPB3.1 C_OPB5.1 C_OPB7.1 C_OPB9.1 C_OPB11.1 C_OPC1.1 C_OPC3.1 C_OPC5.1 C_OPC7.1 C_OPC9.1 C_OPC11.1 CLOCK.1 DDS1.2 DDS2.2 DDS3.2 DDS4.2 DDS5.2 DDS.2 JP33.2 OP_GAIN1.8 OP_GAIN2.8 OP_GAIN3.8 OP_GAIN4.8 OP_GAIN5.8 OP_GAIN.8 OP_HOWL1.8 OP_HOWL2.8 OP_HOWL3.8 OP_HOWL4.8 OP_HOWL5.8 OP_HOWL.8 OP_S2D1.8 OP_S2D2.8 OP_S2D3.8 OP_S2D4.8 OP_S2D5.8 OP_S2D.8 R_PULLUP1.1 R_PULLUP2.1 R_PULLUP3.1 R_PULLUP4.1 R_PULLUP5.1 R_PULLUP.1 R_SET.1 TP_VDD.TP U1.2
VOUT: C_DECOUP.1 DDS.10 TP_VSIN.TP
VOUT1: C_DECOUP1.1 DDS1.10 TP_VSIN4.TP
VOUT2: C_DECOUP2.1 DDS2.10 TP_VSIN8.TP
VOUT3: C_DECOUP3.1 DDS3.10 TP_VSIN12.TP
VOUT4: C_DECOUP4.1 DDS4.10 TP_VSIN16.TP
VOUT5: C_DECOUP5.1 DDS5.10 TP_VSIN20.TP
VSIN: C_DECOUP.2 OP_GAIN.3 R_DECOUP.1
VSIN1: C_DECOUP1.2 OP_GAIN1.3 R_DECOUP1.1
VSIN2: C_DECOUP2.2 OP_GAIN2.3 R_DECOUP2.1
VSIN3: C_DECOUP3.2 OP_GAIN3.3 R_DECOUP3.1
VSIN4: C_DECOUP4.2 OP_GAIN4.3 R_DECOUP4.1
VSIN5: C_DECOUP5.2 OP_GAIN5.3 R_DECOUP5.1
VSS: C_OPA2.1 C_OPA4.1 C_OPA6.1 C_OPA8.1 C_OPA10.1 C_OPA12.1 C_OPB2.1 C_OPB4.1 C_OPB6.1 C_OPB8.1 C_OPB10.1 C_OPB12.1 C_OPC2.1 C_OPC4.1 C_OPC6.1 C_OPC8.1 C_OPC10.1 C_OPC12.1 JP1.1 OP_GAIN1.4 OP_GAIN2.4 OP_GAIN3.4 OP_GAIN4.4 OP_GAIN5.4 OP_GAIN.4 OP_HOWL1.4 OP_HOWL2.4 OP_HOWL3.4 OP_HOWL4.4 OP_HOWL5.4 OP_HOWL.4 OP_S2D1.4 OP_S2D2.4 OP_S2D3.4 OP_S2D4.4 OP_S2D5.4 OP_S2D.4 TP_VSS.TP

## Tracks (layer width: path | path; a pad name or v marks a point on that pad's centre or on a via)
CLK_OUT  (via drill 0.6)
  Top 0.254: DDS.5 11,138.67 v11,137
  Top 0.406: TP_MCLK.TP 54.21,75.23 CLOCK.5
  Bottom 0.254: v11,137 11,137.5
  Bottom 0.61: 11,9 11,60 49.5,60 54,65 54,75.44 TP_MCLK.TP 54,75.58 54,84 46.5,91.5 13,91.5 11,93.5 v11,137
COMP
  Top 0.254: C_DDS3.2 9,144 10.91,142.09 DDS.1
COMP1
  Top 0.254: C_DDS7.2 9,126 10.91,124.08 DDS1.1
COMP2
  Top 0.254: C_DDS11.2 9,108 10.91,106.08 DDS2.1
COMP3
  Top 0.254: C_DDS15.2 9,52 10.91,50.09 DDS3.1
COMP4
  Top 0.254: C_DDS19.2 9,34 10.91,32.09 DDS4.1
COMP5
  Top 0.254: C_DDS23.2 9,16 10.91,14.09 DDS5.1
DDS_SCLK  (via drill 0.6)
  Top 0.254: R2.2 18.9,74.88 R1.1 17.5,76.02 17.5,75 16.76,74.26 TP_SCLK.TP | DDS.7 15.38,139.25 14.25,139.25 v13.5,138.5 | v13.5,96 v13.5,89.5 | v13.5,61.5 v13.5,58.5
  Bottom 0.254: v13.5,89.5 13.5,74.4 | 13.5,74.4 v13.5,61.5 | v13.5,58.5 13.5,10.5 | TP_SCLK.TP 13.5,74.4 | v13.5,96 v13.5,138.5
DDS_SCLK1  (via drill 0.6)
  Top 0.254: DDS1.7 15.38,121.25 14.25,121.25 v13.5,120.5
DDS_SCLK2  (via drill 0.6)
  Top 0.254: DDS2.7 15.38,103.25 14.25,103.25 v13.5,102.5
DDS_SCLK3  (via drill 0.6)
  Top 0.254: DDS3.7 15.38,47.25 14.25,47.25 v13.5,46.5
DDS_SCLK4  (via drill 0.6)
  Top 0.254: DDS4.7 15.38,29.25 14.25,29.25 v13.5,28.5
DDS_SCLK5  (via drill 0.6)
  Top 0.254: DDS5.7 15.38,11.25 14.25,11.25 v13.5,10.5
DDS_SCLK_5V
  Top 0.254: X2.3 10.01,76.15 R1.2
DDS_SDATA  (via drill 0.6)
  Top 0.254: R3.1 17.82,72.54 | 17.82,72.54 R4.2 20.29,72.68 TP_SDATA.TP | DDS.6 15.5,138.65 v15.5,137.5 | v15.5,93 v15.5,90 | v15.5,61.5 v15.5,58.5 | 17.82,72.54 17.5,72.22 v17.5,70.5
  Bottom 0.254: v15.5,90 15.5,70.5 | 15.5,70.5 v15.5,61.5 | v15.5,58.5 15.5,9.5 | v17.5,70.5 15.5,70.5 | v15.5,93 v15.5,137.5
DDS_SDATA1  (via drill 0.6)
  Top 0.254: DDS1.6 15.5,120.64 v15.5,119.5
DDS_SDATA2  (via drill 0.6)
  Top 0.254: DDS2.6 15.5,102.64 v15.5,101.5
DDS_SDATA3  (via drill 0.6)
  Top 0.254: DDS3.6 15.5,46.65 v15.5,45.5
DDS_SDATA4  (via drill 0.6)
  Top 0.254: DDS4.6 15.5,28.64 v15.5,27.5
DDS_SDATA5  (via drill 0.6)
  Top 0.254: DDS5.6 15.5,10.64 v15.5,9.5
DDS_SDATA_5V
  Top 0.254: X2.2 11.2,71.5 14,71.5 15.15,72.65 R3.2
FSYNC  (via drill 0.6)
  Top 0.254: DDS.8 16.25,139.75 17,139 18.22,139 R_PULLUP.2 19.09,142.31 TP_FSYNC.TP | 42.8,78.2 41.2,78.2 40,77 v37,77 | v37,87.5 v37,94.5
  Bottom 0.254: v37,77 v37,87.5 | v37,94.5 33.5,98 33.5,109 27.5,115 27.5,125 30,127.5 30,130.5 26.5,134 26.5,140 24.07,142.43 TP_FSYNC.TP
FSYNC1  (via drill 0.6)
  Top 0.254: DDS1.8 16.25,121.75 17,121 18.22,121 R_PULLUP1.2 19.09,124.31 TP_FSYNC1.TP | 42.8,76.9 41.1,76.9 39.7,75.5 v33.5,75.5 | v33.5,88.5 v33.5,94
  Bottom 0.254: v33.5,75.5 v33.5,88.5 | v33.5,94 31,96.5 28,96.5 27.5,97 27.5,106 29,107.5 29,109.5 26,112.5 26,118 19.57,124.43 TP_FSYNC1.TP
FSYNC2  (via drill 0.6)
  Top 0.254: 17.5,103 18.22,103 R_PULLUP2.2 19.09,106.31 TP_FSYNC2.TP | 17.5,103 17,103 16.25,103.75 DDS2.8 | 42.8,75.6 41.1,75.6 39.5,74 v29,74 | v29,88.5 19.5,98 18,98 17.5,98.5 17.5,103
  Bottom 0.254: v29,74 v29,88.5
FSYNC3  (via drill 0.6)
  Top 0.254: DDS3.8 16.25,47.75 17,47 18.22,47 R_PULLUP3.2 19.09,50.31 TP_FSYNC3.TP | 42.9,74.3 41,74.3 40.5,73.8 v40.5,72 | v31.5,63 25.5,57 v24,57
  Bottom 0.254: v40.5,72 40.5,64.5 39,63 v31.5,63 | v24,57 22.5,55.5 22.5,51.5 21.43,50.43 TP_FSYNC3.TP
FSYNC4  (via drill 0.6)
  Top 0.254: DDS4.8 16.25,29.75 17,29 18.22,29 R_PULLUP4.2 19.09,32.31 TP_FSYNC4.TP | 48.4,78.2 50.2,78.2 50.5,77.9 50.5,72.5 48.5,70.5 v48,70.5 | v46.5,62.5 v46.5,58
  Bottom 0.254: v48,70.5 46.5,69 v46.5,62.5 | v46.5,58 31.5,58 29,55.5 29,49.5 26,46.5 26,38 20.43,32.43 TP_FSYNC4.TP
FSYNC5  (via drill 0.6)
  Top 0.254: DDS5.8 16.25,11.75 17,11 18.22,11 R_PULLUP5.2 19.09,14.31 TP_FSYNC5.TP | 48.3,76.9 49.2,76.9 49.6,76.5 49.6,73.2 48.9,72.5 45.5,72.5 43.5,70.5 v43.5,68.5 | v43.5,64.5 38.5,59.5 31,59.5 30.5,59 v30.5,54
  Bottom 0.254: v43.5,68.5 v43.5,64.5 | v30.5,54 30.5,46.5 29.5,45.5 28,45.5 27.5,45 27.5,38 29,36.5 29,30 26.5,27.5 26.5,23 23,19.5 23,15.5 21.93,14.43 TP_FSYNC5.TP
FSYNC_IN
  Top 0.254: R11.2 16.45,81 R14.2 20.65,79.5 23,79.5 24,80.5 31.5,80.5 33.15,78.86 U1.5 45.5,78.86 | 45.5,78.86 U1.20 | U1.11 42.71,75 45,75 | 45,75 45.5,75.5 45.5,76.25 | 45.5,76.25 45.5,77.5 | 45.5,77.5 45.5,78.86 | U1.9 42.7,76.25 45.5,76.25 | U1.7 42.74,77.5 45.5,77.5 | U1.14 48.29,75 45,75 | U1.16 48.3,76.25 45.5,76.25 | U1.18 48.26,77.5 45.5,77.5
FSYNC_IN_5V
  Top 0.254: R11.1 13.46,79.91 X2.9
GND  (via drill 0.6)
  Top 0.254: v2.5,136.5 C_DDS2.2 2.61,139.32 C_DDS1.2 7.56,139.32 C_DDS4.1 7.66,139.24 DDS.4 | C_OPA2.2 38,147.5 v40,147.5 42.91,147.5 C_OPA1.2 | R_GAIN1.1 32.5,136.5 v30.5,136.5 | C_OPB2.2 v49.5,136 | R_S2D2.2 49.5,140.75 v49.5,142.5 | C_OPB1.2 v58,147 | R_DECOUP.2 18.68,145 v20.5,145 | DDS.9 v17.5,140.25 | C_OPC1.2 v83,141 C_OPC2.2 | R14.1 v22.5,81 | R12.1 v26,62.5 | R6.2 20.65,66.5 v22.5,66.5 | R8.2 19.65,83.5 v21.5,83.5 | R2.1 20.43,76.5 v22.5,76.5 30.35,76.5 R13.1 | R4.1 20.49,70.5 v22,70.5 | v50,79.5 48.34,79.5 U1.21 U1.4 | v2.5,44.5 C_DDS14.2 2.61,47.32 C_DDS13.2 7.56,47.32 C_DDS16.1 7.66,47.24 DDS3.4 | C_OPA8.2 38,55.5 v40,55.5 42.91,55.5 C_OPA7.2 | R_GAIN4.1 32.5,44.5 v30.5,44.5 | C_OPB8.2 v49.5,44 | R_S2D14.2 49.5,48.75 v49.5,50.5 | C_OPB7.2 v58,55 | R_DECOUP3.2 18.68,53 v20.5,53 | DDS3.9 v17.5,48.25 | C_OPC7.2 v83,49 C_OPC8.2 | v2.5,118.5 C_DDS6.2 2.61,121.32 C_DDS5.2 7.56,121.32 C_DDS8.1 7.66,121.24 DDS1.4 | C_OPA4.2 38,129.5 v40,129.5 42.91,129.5 C_OPA3.2 | R_GAIN2.1 32.5,118.5 v30.5,118.5 | C_OPB4.2 v49.5,118 | R_S2D6.2 49.5,122.75 v49.5,124.5 | C_OPB3.2 v58,129 | R_DECOUP1.2 18.68,127 v20.5,127 | DDS1.9 v17.5,122.25 | C_OPC3.2 v83,123 C_OPC4.2 | v2.5,100.5 C_DDS10.2 2.61,103.32 C_DDS9.2 7.56,103.32 C_DDS12.1 7.66,103.24 DDS2.4 | C_OPA6.2 38,111.5 v40,111.5 42.91,111.5 C_OPA5.2 | R_GAIN3.1 32.5,100.5 v30.5,100.5 | C_OPB6.2 v49.5,100 | R_S2D10.2 49.5,104.75 v49.5,106.5 | C_OPB5.2 v58,111 | R_DECOUP2.2 18.68,109 v20.5,109 | DDS2.9 v17.5,104.25 | C_OPC5.2 v83,105 C_OPC6.2 | v2.5,26.5 C_DDS18.2 2.61,29.32 C_DDS17.2 7.56,29.32 C_DDS20.1 7.66,29.24 DDS4.4 | C_OPA10.2 38,37.5 v40,37.5 42.91,37.5 C_OPA9.2 | R_GAIN5.1 32.5,26.5 v30.5,26.5
  Top 0.254: C_OPB10.2 v49.5,26 | R_S2D18.2 49.5,30.75 v49.5,32.5 | C_OPB9.2 v58,37 | R_DECOUP4.2 18.68,35 v20.5,35 | DDS4.9 v17.5,30.25 | C_OPC9.2 v83,31 C_OPC10.2 | v2.5,8.5 C_DDS22.2 2.61,11.32 C_DDS21.2 7.56,11.32 C_DDS24.1 7.66,11.24 DDS5.4 | C_OPA12.2 38,19.5 v40,19.5 42.91,19.5 C_OPA11.2 | R_GAIN6.1 32.5,8.5 v30.5,8.5 | C_OPB12.2 v49.5,8 | R_S2D22.2 49.5,12.75 v49.5,14.5 | C_OPB11.2 v58,19 | R_DECOUP5.2 18.68,17 v20.5,17 | DDS5.9 v17.5,12.25 | C_OPC11.2 v83,13 C_OPC12.2
  Top 0.406: C_CLK_BYP.2 60.38,80.5 58.5,80.5 v56.52,78.52 CLOCK.4 57.47,76.18 CLOCK.2
  GND 0.254: v2.5,136.5 2.5,135 | 20,132.5 20,132 | v40,147.5 41,146.5 | v49.5,136 48.5,135 | v17.5,140.25 17.25,140 17.5,140 | v83,141 83,139.5 | v22.5,76.5 22.5,76 | v50,79.5 50,79
  GND 0.406: v56.52,78.52 56.5,78.5
  pour GND: 105,153 105,150 105,-5 -9,-5 -11,-5 -11,153 -1,153
N$1
  Top 0.254: DDS.3 9.5,139.75 8.12,141.13 C_DDS4.2
N$2
  Top 0.406: R_SET.2 63.08,77.13 CLOCK.3
N$3
  Top 0.254: R_GAINF.3 27.94,143.56 OP_GAIN.1 38.44,143.56 41,141 41,136 44.15,132.85 R_S2D3.2 50.87,132.77 R_S2D4.2 50.36,131.01 TP_VSIN1.TP
N$4
  Top 0.254: OP_S2D.6 OP_S2D.7 68.26,141.22 R_HOW3.2 | R_HOW3.2 68.62,140.54 | R_HOW2.2 68.91,138.91 | 68.91,138.91 68.78,139.04 R_HOW3.2 | TP_VSIN3.TP 68.49,138.91 68.91,138.91
N$5
  Top 0.254: R_GAIN1.2 34.92,137.02 | R_GAINF.1 25.8,133 32,133 34.7,135.7 R_GAIN1.2 | OP_GAIN.2 37.96,141 39,141 40,140 40,138 39.25,137.25 36.25,137.25 35.8,136.8 R_GAIN1.2
N$6
  Top 0.254: R_S2D4.1 53.27,131 58,131 63.14,136.14 OP_S2D.5
N$7  (via drill 0.6)
  Top 0.254: OP_HOWL.5 86.56,136.56 85,135 72.72,135 72.72,137 R_HOW2.1 | 92.66,136.5 R_HOW10.1 92.46,136.46 v90.5,134.5
  Bottom 0.254: v90.5,134.5 88.26,136.74 OP_HOWL.5
N$8  (via drill 0.6)
  Top 0.254: R_S2D1.1 53.5,143.76 OP_S2D.1 57.24,143.76 58.5,142.5 67.26,142.5 R_HOW1.2 | v67,135 67,134.14 R_HOW4.2 65.44,132.7 TP_VSIN2.TP
  Bottom 0.254: v67,135 67,138.5 65.5,140 62,140 58.24,143.76 OP_S2D.1
N$9
  Top 0.254: R_S2D2.1 49.37,138.68 OP_S2D.3
N$10
  Top 0.254: R_S2D1.2 53.44,141.22 OP_S2D.2 57.78,141.22 59,140 59,134.5 57.5,133 53.46,133 53.15,133.31 R_S2D3.1
N$11  (via drill 0.6)
  Top 0.254: R_HOW1.1 70.36,146.36 71.15,147.15 R_HOW9.1 73.48,147.98 74,148.5 v80,148.5
  Bottom 0.254: v80,148.5 81.5,147 81.5,141 79.78,139.28 OP_HOWL.3
N$12
  Top 0.254: R_HOW3.1 70.73,140.65 R_HOW6.1 73.5,140.61 73.5,139 74,138.5 76.5,138.5 77,139 77,140.5 78.32,141.82 OP_HOWL.2
N$13
  Top 0.254: R_HOW5.1 73.5,145 75.38,146.88 | 75.38,146.88 R_HOW9.2 | 75.38,146.88 75.5,147 93,147 96.8,143.2 JP_OUT.2
N$14
  Top 0.254: R_HOW8.2 92.5,144.19 92.5,141.5 93.56,140.44 | 93.56,140.44 JP_OUT.1 | R_HOW10.2 93.56,139.22 93.56,140.44
N$15
  Top 0.254: DDS1.3 9.5,121.75 8.12,123.13 C_DDS8.2
N$16
  Top 0.254: OP_HOWL.1 75.96,144.36 R_HOW5.2 75.4,140.69 R_HOW6.2
N$17
  Top 0.254: OP_HOWL.7 90.03,141.82 R_HOW7.1 R_HOW8.1
N$18
  Top 0.254: R_GAINF1.3 27.94,125.56 OP_GAIN1.1 38.44,125.56 41,123 41,118 44.15,114.85 R_S2D7.2 50.87,114.77 R_S2D8.2 50.36,113.01 TP_VSIN5.TP
N$19
  Top 0.254: R_GAIN2.2 34.92,119.02 | R_GAINF1.1 25.8,115 32,115 34.7,117.7 R_GAIN2.2 | OP_GAIN1.2 37.96,123 39,123 40,122 40,120 39.25,119.25 36.25,119.25 35.8,118.8 R_GAIN2.2
N$20
  Top 0.254: R_HOW4.1 70.64,133 86.5,133 89,135.5 89,138 87.72,139.28 | 87.72,139.28 OP_HOWL.6 | R_HOW7.2 89.63,139.28 87.72,139.28
N$21
  Top 0.254: R_S2D8.1 53.27,113 58,113 63.14,118.14 OP_S2D1.5
N$22  (via drill 0.6)
  Top 0.254: R_S2D5.1 53.5,125.76 OP_S2D1.1 57.24,125.76 58.5,124.5 67.26,124.5 R_HOW11.2 | v67,117 67,116.14 R_HOW15.2 65.44,114.7 TP_VSIN6.TP
  Bottom 0.254: v67,117 67,120.5 65.5,122 62,122 58.24,125.76 OP_S2D1.1
N$23
  Top 0.254: R_S2D6.1 49.37,120.68 OP_S2D1.3
N$24
  Top 0.254: R_S2D5.2 53.44,123.22 OP_S2D1.2 57.78,123.22 59,122 59,116.5 57.5,115 53.46,115 53.15,115.31 R_S2D7.1
N$25
  Top 0.254: R_HOW14.1 70.73,122.65 R_HOW17.1 73.5,122.61 73.5,121 74,120.5 76.5,120.5 77,121 77,122.5 78.32,123.82 OP_HOWL1.2
N$26
  Top 0.254: R_HOW19.2 92.5,126.19 92.5,123.5 93.56,122.44 | 93.56,122.44 JP_OUT1.1 | R_HOW12.2 93.56,121.22 93.56,122.44
N$27
  Top 0.254: OP_HOWL1.1 75.96,126.36 R_HOW16.2 75.4,122.69 R_HOW17.2
N$28
  Top 0.254: OP_HOWL1.7 90.03,123.82 R_HOW18.1 R_HOW19.1
N$29
  Top 0.254: R_HOW15.1 70.64,115 86.5,115 89,117.5 89,120 87.72,121.28 | 87.72,121.28 OP_HOWL1.6 | R_HOW18.2 89.63,121.28 87.72,121.28
N$30
  Top 0.254: OP_S2D1.6 OP_S2D1.7 68.26,123.22 R_HOW14.2 | R_HOW14.2 68.62,122.54 | R_HOW13.2 68.91,120.91 | 68.91,120.91 68.78,121.04 R_HOW14.2 | TP_VSIN7.TP 68.49,120.91 68.91,120.91
N$31  (via drill 0.6)
  Top 0.254: R_HOW11.1 70.36,128.36 71.15,129.15 R_HOW20.1 73.48,129.98 74,130.5 v80,130.5
  Bottom 0.254: v80,130.5 81.5,129 81.5,123 79.78,121.28 OP_HOWL1.3
N$32  (via drill 0.6)
  Top 0.254: OP_HOWL1.5 86.56,118.56 85,117 72.72,117 72.72,119 R_HOW13.1 | 92.66,118.5 R_HOW12.1 92.46,118.46 v90.5,116.5
  Bottom 0.254: v90.5,116.5 88.26,118.74 OP_HOWL1.5
N$33
  Top 0.254: R_HOW16.1 73.5,127 75.38,128.88 | 75.38,128.88 R_HOW20.2 | 75.38,128.88 75.5,129 93,129 96.8,125.2 JP_OUT1.2
N$34
  Top 0.254: DDS2.3 9.5,103.75 8.12,105.13 C_DDS12.2
N$35
  Top 0.254: R_GAINF2.3 27.94,107.56 OP_GAIN2.1 38.44,107.56 41,105 41,100 44.15,96.85 R_S2D11.2 50.87,96.77 R_S2D12.2 50.36,95.01 TP_VSIN9.TP
N$36
  Top 0.254: R_GAIN3.2 34.92,101.02 | R_GAINF2.1 25.8,97 32,97 34.7,99.7 R_GAIN3.2 | OP_GAIN2.2 37.96,105 39,105 40,104 40,102 39.25,101.25 36.25,101.25 35.8,100.8 R_GAIN3.2
N$37
  Top 0.254: R_S2D12.1 53.27,95 58,95 63.14,100.14 OP_S2D2.5
N$38  (via drill 0.6)
  Top 0.254: R_S2D9.1 53.5,107.76 OP_S2D2.1 57.24,107.76 58.5,106.5 67.26,106.5 R_HOW21.2 | v67,99 67,98.14 R_HOW25.2 65.44,96.7 TP_VSIN10.TP
  Bottom 0.254: v67,99 67,102.5 65.5,104 62,104 58.24,107.76 OP_S2D2.1
N$39
  Top 0.254: R_S2D10.1 49.37,102.68 OP_S2D2.3
N$40
  Top 0.254: R_S2D9.2 53.44,105.22 OP_S2D2.2 57.78,105.22 59,104 59,98.5 57.5,97 53.46,97 53.15,97.31 R_S2D11.1
N$41
  Top 0.254: R_HOW24.1 70.73,104.65 R_HOW27.1 73.5,104.61 73.5,103 74,102.5 76.5,102.5 77,103 77,104.5 78.32,105.82 OP_HOWL2.2
N$42
  Top 0.254: R_HOW29.2 92.5,108.19 92.5,105.5 93.56,104.44 | 93.56,104.44 JP_OUT2.1 | R_HOW22.2 93.56,103.22 93.56,104.44
N$43
  Top 0.254: OP_HOWL2.1 75.96,108.36 R_HOW26.2 75.4,104.69 R_HOW27.2
N$44
  Top 0.254: OP_HOWL2.7 90.03,105.82 R_HOW28.1 R_HOW29.1
N$45
  Top 0.254: R_HOW25.1 70.64,97 86.5,97 89,99.5 89,102 87.72,103.28 | 87.72,103.28 OP_HOWL2.6 | R_HOW28.2 89.63,103.28 87.72,103.28
N$46
  Top 0.254: OP_S2D2.6 OP_S2D2.7 68.26,105.22 R_HOW24.2 | R_HOW24.2 68.62,104.54 | R_HOW23.2 68.91,102.91 | 68.91,102.91 68.78,103.04 R_HOW24.2 | TP_VSIN11.TP 68.49,102.91 68.91,102.91
N$47  (via drill 0.6)
  Top 0.254: R_HOW21.1 70.36,110.36 71.15,111.15 R_HOW30.1 73.48,111.98 74,112.5 v80,112.5
  Bottom 0.254: v80,112.5 81.5,111 81.5,105 79.78,103.28 OP_HOWL2.3
N$48  (via drill 0.6)
  Top 0.254: OP_HOWL2.5 86.56,100.56 85,99 72.72,99 72.72,101 R_HOW23.1 | 92.66,100.5 R_HOW22.1 92.46,100.46 v90.5,98.5
  Bottom 0.254: v90.5,98.5 88.26,100.74 OP_HOWL2.5
N$49
  Top 0.254: R_HOW26.1 73.5,109 75.38,110.88 | 75.38,110.88 R_HOW30.2 | 75.38,110.88 75.5,111 93,111 96.8,107.2 JP_OUT2.2
N$50
  Top 0.254: DDS3.3 9.5,47.75 8.12,49.13 C_DDS16.2
N$51
  Top 0.254: R_GAINF3.3 27.94,51.56 OP_GAIN3.1 38.44,51.56 41,49 41,44 44.15,40.85 R_S2D15.2 50.87,40.77 R_S2D16.2 50.36,39.01 TP_VSIN13.TP
N$52
  Top 0.254: R_GAIN4.2 34.92,45.02 | R_GAINF3.1 25.8,41 32,41 34.7,43.7 R_GAIN4.2 | OP_GAIN3.2 37.96,49 39,49 40,48 40,46 39.25,45.25 36.25,45.25 35.8,44.8 R_GAIN4.2
N$53
  Top 0.254: R_S2D16.1 53.27,39 58,39 63.14,44.14 OP_S2D3.5
N$54  (via drill 0.6)
  Top 0.254: R_S2D13.1 53.5,51.76 OP_S2D3.1 57.24,51.76 58.5,50.5 67.26,50.5 R_HOW31.2 | v67,43 67,42.14 R_HOW35.2 65.44,40.7 TP_VSIN14.TP
  Bottom 0.254: v67,43 67,46.5 65.5,48 62,48 58.24,51.76 OP_S2D3.1
N$55
  Top 0.254: R_S2D14.1 49.37,46.68 OP_S2D3.3
N$56
  Top 0.254: R_S2D13.2 53.44,49.22 OP_S2D3.2 57.78,49.22 59,48 59,42.5 57.5,41 53.46,41 53.15,41.31 R_S2D15.1
N$57
  Top 0.254: R_HOW34.1 70.73,48.65 R_HOW37.1 73.5,48.61 73.5,47 74,46.5 76.5,46.5 77,47 77,48.5 78.32,49.82 OP_HOWL3.2
N$58
  Top 0.254: R_HOW39.2 92.5,52.19 92.5,49.5 93.56,48.44 | 93.56,48.44 JP_OUT3.1 | R_HOW32.2 93.56,47.22 93.56,48.44
N$59
  Top 0.254: OP_HOWL3.1 75.96,52.36 R_HOW36.2 75.4,48.69 R_HOW37.2
N$60
  Top 0.254: OP_HOWL3.7 90.03,49.82 R_HOW38.1 R_HOW39.1
N$61
  Top 0.254: R_HOW35.1 70.64,41 86.5,41 89,43.5 89,46 87.72,47.28 | 87.72,47.28 OP_HOWL3.6 | R_HOW38.2 89.63,47.28 87.72,47.28
N$62
  Top 0.254: OP_S2D3.6 OP_S2D3.7 68.26,49.22 R_HOW34.2 | R_HOW34.2 68.62,48.54 | R_HOW33.2 68.91,46.91 | 68.91,46.91 68.78,47.04 R_HOW34.2 | TP_VSIN15.TP 68.49,46.91 68.91,46.91
N$63  (via drill 0.6)
  Top 0.254: R_HOW31.1 70.36,54.36 71.15,55.15 R_HOW40.1 73.48,55.98 74,56.5 v80,56.5
  Bottom 0.254: v80,56.5 81.5,55 81.5,49 79.78,47.28 OP_HOWL3.3
N$64  (via drill 0.6)
  Top 0.254: OP_HOWL3.5 86.56,44.56 85,43 72.72,43 72.72,45 R_HOW33.1 | 92.66,44.5 R_HOW32.1 92.46,44.46 v90.5,42.5
  Bottom 0.254: v90.5,42.5 88.26,44.74 OP_HOWL3.5
N$65
  Top 0.254: R_HOW36.1 73.5,53 75.38,54.88 | 75.38,54.88 R_HOW40.2 | 75.38,54.88 75.5,55 93,55 96.8,51.2 JP_OUT3.2
N$66
  Top 0.254: DDS4.3 9.5,29.75 8.12,31.13 C_DDS20.2
N$67
  Top 0.254: R_GAINF4.3 27.94,33.56 OP_GAIN4.1 38.44,33.56 41,31 41,26 44.15,22.85 R_S2D19.2 50.87,22.77 R_S2D20.2 50.36,21.01 TP_VSIN17.TP
N$68
  Top 0.254: R_GAIN5.2 34.92,27.02 | R_GAINF4.1 25.8,23 32,23 34.7,25.7 R_GAIN5.2 | OP_GAIN4.2 37.96,31 39,31 40,30 40,28 39.25,27.25 36.25,27.25 35.8,26.8 R_GAIN5.2
N$69
  Top 0.254: R_S2D20.1 53.27,21 58,21 63.14,26.14 OP_S2D4.5
N$70  (via drill 0.6)
  Top 0.254: R_S2D17.1 53.5,33.76 OP_S2D4.1 57.24,33.76 58.5,32.5 67.26,32.5 R_HOW41.2 | v67,25 67,24.14 R_HOW45.2 65.44,22.7 TP_VSIN18.TP
  Bottom 0.254: v67,25 67,28.5 65.5,30 62,30 58.24,33.76 OP_S2D4.1
N$71
  Top 0.254: R_S2D18.1 49.37,28.68 OP_S2D4.3
N$72
  Top 0.254: R_S2D17.2 53.44,31.22 OP_S2D4.2 57.78,31.22 59,30 59,24.5 57.5,23 53.46,23 53.15,23.31 R_S2D19.1
N$73
  Top 0.254: R_HOW44.1 70.73,30.65 R_HOW47.1 73.5,30.61 73.5,29 74,28.5 76.5,28.5 77,29 77,30.5 78.32,31.82 OP_HOWL4.2
N$74
  Top 0.254: R_HOW49.2 92.5,34.19 92.5,31.5 93.56,30.44 | 93.56,30.44 JP_OUT4.1 | R_HOW42.2 93.56,29.22 93.56,30.44
N$75
  Top 0.254: OP_HOWL4.1 75.96,34.36 R_HOW46.2 75.4,30.69 R_HOW47.2
N$76
  Top 0.254: OP_HOWL4.7 90.03,31.82 R_HOW48.1 R_HOW49.1
N$77
  Top 0.254: R_HOW45.1 70.64,23 86.5,23 89,25.5 89,28 87.72,29.28 | 87.72,29.28 OP_HOWL4.6 | R_HOW48.2 89.63,29.28 87.72,29.28
N$78
  Top 0.254: OP_S2D4.6 OP_S2D4.7 68.26,31.22 R_HOW44.2 | R_HOW44.2 68.62,30.54 | R_HOW43.2 68.91,28.91 | 68.91,28.91 68.78,29.04 R_HOW44.2 | TP_VSIN19.TP 68.49,28.91 68.91,28.91
N$79  (via drill 0.6)
  Top 0.254: R_HOW41.1 70.36,36.36 71.15,37.15 R_HOW50.1 73.48,37.98 74,38.5 v80,38.5
  Bottom 0.254: v80,38.5 81.5,37 81.5,31 79.78,29.28 OP_HOWL4.3
N$80  (via drill 0.6)
  Top 0.254: OP_HOWL4.5 86.56,26.56 85,25 72.72,25 72.72,27 R_HOW43.1 | 92.66,26.5 R_HOW42.1 92.46,26.46 v90.5,24.5
  Bottom 0.254: v90.5,24.5 88.26,26.74 OP_HOWL4.5
N$81
  Top 0.254: R_HOW46.1 73.5,35 75.38,36.88 | 75.38,36.88 R_HOW50.2 | 75.38,36.88 75.5,37 93,37 96.8,33.2 JP_OUT4.2
N$82
  Top 0.254: DDS5.3 9.5,11.75 8.12,13.13 C_DDS24.2
N$83
  Top 0.254: R_GAINF5.3 27.94,15.56 OP_GAIN5.1 38.44,15.56 41,13 41,8 44.15,4.85 R_S2D23.2 50.87,4.77 R_S2D24.2 50.36,3.01 TP_VSIN21.TP
N$84
  Top 0.254: R_GAIN6.2 34.92,9.02 | R_GAINF5.1 25.8,5 32,5 34.7,7.7 R_GAIN6.2 | OP_GAIN5.2 37.96,13 39,13 40,12 40,10 39.25,9.25 36.25,9.25 35.8,8.8 R_GAIN6.2
N$85
  Top 0.254: R_S2D24.1 53.27,3 58,3 63.14,8.14 OP_S2D5.5
N$86  (via drill 0.6)
  Top 0.254: R_S2D21.1 53.5,15.76 OP_S2D5.1 57.24,15.76 58.5,14.5 67.26,14.5 R_HOW51.2 | v67,7 67,6.14 R_HOW55.2 65.44,4.7 TP_VSIN22.TP
  Bottom 0.254: v67,7 67,10.5 65.5,12 62,12 58.24,15.76 OP_S2D5.1
N$87
  Top 0.254: R_S2D22.1 49.37,10.68 OP_S2D5.3
N$88
  Top 0.254: R_S2D21.2 53.44,13.22 OP_S2D5.2 57.78,13.22 59,12 59,6.5 57.5,5 53.46,5 53.15,5.31 R_S2D23.1
N$89
  Top 0.254: R_HOW54.1 70.73,12.65 R_HOW57.1 73.5,12.61 73.5,11 74,10.5 76.5,10.5 77,11 77,12.5 78.32,13.82 OP_HOWL5.2
N$90
  Top 0.254: R_HOW59.2 92.5,16.19 92.5,13.5 93.56,12.44 | 93.56,12.44 JP_OUT5.1 | R_HOW52.2 93.56,11.22 93.56,12.44
N$91
  Top 0.254: OP_HOWL5.1 75.96,16.36 R_HOW56.2 75.4,12.69 R_HOW57.2
N$92
  Top 0.254: OP_HOWL5.7 90.03,13.82 R_HOW58.1 R_HOW59.1
N$93
  Top 0.254: R_HOW55.1 70.64,5 86.5,5 89,7.5 89,10 87.72,11.28 | 87.72,11.28 OP_HOWL5.6 | R_HOW58.2 89.63,11.28 87.72,11.28
N$94
  Top 0.254: OP_S2D5.6 OP_S2D5.7 68.26,13.22 R_HOW54.2 | R_HOW54.2 68.62,12.54 | R_HOW53.2 68.91,10.91 | 68.91,10.91 68.78,11.04 R_HOW54.2 | TP_VSIN23.TP 68.49,10.91 68.91,10.91
N$95  (via drill 0.6)
  Top 0.254: R_HOW51.1 70.36,18.36 71.15,19.15 R_HOW60.1 73.48,19.98 74,20.5 v80,20.5
  Bottom 0.254: v80,20.5 81.5,19 81.5,13 79.78,11.28 OP_HOWL5.3
N$96  (via drill 0.6)
  Top 0.254: OP_HOWL5.5 86.56,8.56 85,7 72.72,7 72.72,9 R_HOW53.1 | 92.66,8.5 R_HOW52.1 92.46,8.46 v90.5,6.5
  Bottom 0.254: v90.5,6.5 88.26,8.74 OP_HOWL5.5
N$97
  Top 0.254: R_HOW56.1 73.5,17 75.38,18.88 | 75.38,18.88 R_HOW60.2 | 75.38,18.88 75.5,19 93,19 96.8,15.2 JP_OUT5.2
S$2  (via drill 0.6)
  Top 0.254: DDS1.5 11,120.67 v11,119
  Bottom 0.254: v11,119 11,119.5
S$3  (via drill 0.6)
  Top 0.254: DDS2.5 11,102.67 v11,101
  Bottom 0.254: v11,101 11,101.5
S$4  (via drill 0.6)
  Top 0.254: DDS3.5 11,46.67 v11,45
  Bottom 0.254: v11,45 11,45.5
S$5  (via drill 0.6)
  Top 0.254: DDS4.5 11,28.67 v11,27
  Bottom 0.254: v11,27 11,27.5
S$6  (via drill 0.6)
  Top 0.254: DDS5.5 11,10.67 v11,9
  Bottom 0.254: v11,9 11,9.5
SW_DIN
  Top 0.254: R7.2 16.6,85.35 R8.1 19.65,85.5 28,85.5 33.32,80.18 U1.3
SW_DIN_5V
  Top 0.254: R7.1 14.55,85.28 10.55,81.28 X2.5
SW_SCLK  (via drill 0.6)
  Top 0.254: R5.2 18.3,68.35 R6.1 20.65,68.5 v33.5,68.5 | v35.5,81.5 35.53,81.47 U1.1
  Bottom 0.254: v33.5,68.5 35,70 35,81 v35.5,81.5
SW_SCLK_5V
  Top 0.254: X2.1 11.95,68 R5.1
SW_~RESET  (via drill 0.6)
  Top 0.254: R10.2 27.1,78.35 R13.2 30.85,78 v39,78 | v46,83 46.5,82.5 46.5,81.5 47.19,80.81 U1.23
  Bottom 0.254: v39,78 44,78 46,80 v46,83
SW_~RESET_5V
  Top 0.254: X2.8 7.2,77.25 11.5,77.25 12.75,78.5 R10.1
SW_~SYNC
  Top 0.254: R9.2 R12.2 26.65,66.5 46.5,66.5 51.5,71.5 51.5,80 50.03,81.47 U1.24
SW_~SYNC_5V
  Top 0.254: X2.7 5,72.31 5,70 8,67 12,67 16.5,62.5 R9.1
VDD  (via drill 0.6)
  Top 0.254: C_OPA1.1 45.56,146.75 OP_GAIN.8 | C_OPB1.1 64.06,144.88 OP_S2D.8 | C_OPC1.1 83.8,144.36 OP_HOWL.8 | 10.92,140.25 DDS.2 9.74,140.26 9.5,140.5 9.5,141.5 v9.25,141.75 | R_PULLUP.1 19.32,136 v21.5,136 | C_DDS1.1 5,143.5 C_DDS3.1 4,143.5 v2.5,143.5 C_DDS2.1 | U1.2 42.74,80.75 v44.5,80.75 | C_OPA3.1 45.56,128.75 OP_GAIN1.8 | C_OPB3.1 64.06,126.88 OP_S2D1.8 | C_OPC3.1 83.8,126.36 OP_HOWL1.8 | 10.92,122.25 DDS1.2 9.74,122.26 9.5,122.5 9.5,123.5 v9.25,123.75 | R_PULLUP1.1 19.32,118 v21.5,118 | C_DDS5.1 5,125.5 C_DDS7.1 4,125.5 v2.5,125.5 C_DDS6.1 | C_OPA5.1 45.56,110.75 OP_GAIN2.8 | C_OPB5.1 64.06,108.88 OP_S2D2.8 | C_OPC5.1 83.8,108.36 OP_HOWL2.8 | 10.92,104.25 DDS2.2 9.74,104.26 9.5,104.5 9.5,105.5 v9.25,105.75 | R_PULLUP2.1 19.32,100 v21.5,100 | C_DDS9.1 5,107.5 C_DDS11.1 4,107.5 v2.5,107.5 C_DDS10.1 | C_OPA7.1 45.56,54.75 OP_GAIN3.8 | C_OPB7.1 64.06,52.88 OP_S2D3.8 | C_OPC7.1 83.8,52.36 OP_HOWL3.8 | 10.92,48.25 DDS3.2 9.74,48.26 9.5,48.5 9.5,49.5 v9.25,49.75 | R_PULLUP3.1 19.32,44 v21.5,44 | C_DDS13.1 5,51.5 C_DDS15.1 4,51.5 v2.5,51.5 C_DDS14.1 | C_OPA9.1 45.56,36.75 OP_GAIN4.8 | C_OPB9.1 64.06,34.88 OP_S2D4.8 | C_OPC9.1 83.8,34.36 OP_HOWL4.8 | 10.92,30.25 DDS4.2 9.74,30.26 9.5,30.5 9.5,31.5 v9.25,31.75 | R_PULLUP4.1 19.32,26 v21.5,26 | C_DDS17.1 5,33.5 C_DDS19.1 4,33.5 v2.5,33.5 C_DDS18.1 | C_OPA11.1 45.56,18.75 OP_GAIN5.8 | C_OPB11.1 64.06,16.88 OP_S2D5.8 | C_OPC11.1 83.8,16.36 OP_HOWL5.8 | 10.92,12.25 DDS5.2 9.74,12.26 9.5,12.5 9.5,13.5 v9.25,13.75 | R_PULLUP5.1 19.32,8 v21.5,8 | C_DDS21.1 5,15.5 C_DDS23.1 4,15.5 v2.5,15.5 C_DDS22.1
  Top 0.406: C_CLK_BYP.1 63.41,80.59 65,79 65,76 64.5,75.5 R_SET.1 62.88,75.23 CLOCK.1 59,75.11 v59,73.5
  VDD 0.254: v2.5,143.5 2.5,142 | 44.75,79.5 45,79.5
  VDD 0.406: v59,73.5 59,69.5
  pour VDD: -4,154 110,154 110,153 110,-31 -9,-31 -9,-27 -9,154
VOUT
  Top 0.254: DDS.10 15.38,145.22 C_DECOUP.1 8.34,145.43 TP_VSIN.TP
VOUT1
  Top 0.254: DDS1.10 15.38,127.22 C_DECOUP1.1 8.34,127.43 TP_VSIN4.TP
VOUT2
  Top 0.254: DDS2.10 15.38,109.22 C_DECOUP2.1 8.34,109.43 TP_VSIN8.TP
VOUT3
  Top 0.254: DDS3.10 15.38,53.23 C_DECOUP3.1 8.34,53.43 TP_VSIN12.TP
VOUT4
  Top 0.254: DDS4.10 15.38,35.23 C_DECOUP4.1 8.34,35.43 TP_VSIN16.TP
VOUT5
  Top 0.254: DDS5.10 15.38,17.23 C_DECOUP5.1 8.34,17.43 TP_VSIN20.TP
VSIN
  Top 0.254: C_DECOUP.2 15.75,147.17 R_DECOUP.1 18.58,147 21,147 29.52,138.48 OP_GAIN.3
VSIN1
  Top 0.254: C_DECOUP1.2 15.75,129.17 R_DECOUP1.1 18.58,129 21,129 29.52,120.48 OP_GAIN1.3
VSIN2
  Top 0.254: C_DECOUP2.2 15.75,111.17 R_DECOUP2.1 18.58,111 21,111 29.52,102.48 OP_GAIN2.3
VSIN3
  Top 0.254: C_DECOUP3.2 15.75,55.17 R_DECOUP3.1 18.58,55 21,55 29.52,46.48 OP_GAIN3.3
VSIN4
  Top 0.254: C_DECOUP4.2 15.75,37.17 R_DECOUP4.1 18.58,37 21,37 29.52,28.48 OP_GAIN4.3
VSIN5
  Top 0.254: C_DECOUP5.2 15.75,19.17 R_DECOUP5.1 18.58,19 21,19 29.52,10.48 OP_GAIN5.3
VSS  (via drill 0.6)
  Top 0.254: OP_S2D.4 56.3,136 C_OPB2.1 | C_OPC2.1 82.71,136.74 OP_HOWL.4 | C_OPA2.1 35.8,147.5 v33.5,147.5 | OP_S2D1.4 56.3,118 C_OPB4.1 | C_OPC4.1 82.71,118.74 OP_HOWL1.4 | C_OPA4.1 35.8,129.5 v33.5,129.5 | OP_S2D2.4 56.3,100 C_OPB6.1 | C_OPC6.1 82.71,100.74 OP_HOWL2.4 | C_OPA6.1 35.8,111.5 v33.5,111.5 | OP_S2D3.4 56.3,44 C_OPB8.1 | C_OPC8.1 82.71,44.74 OP_HOWL3.4 | C_OPA8.1 35.8,55.5 v33.5,55.5 | OP_S2D4.4 56.3,26 C_OPB10.1 | C_OPC10.1 82.71,26.74 OP_HOWL4.4 | C_OPA10.1 35.8,37.5 v33.5,37.5 | OP_S2D5.4 56.3,8 C_OPB12.1 | C_OPC12.1 82.71,8.74 OP_HOWL5.4 | C_OPA12.1 35.8,19.5 v33.5,19.5
  Bottom 0.254: v33.5,147.5 32.5,147.5 | v33.5,129.5 32.5,129.5 | v33.5,111.5 32.5,111.5 | v33.5,55.5 32.5,55.5 | v33.5,37.5 32.5,37.5 | v33.5,19.5 32.5,19.5
  pour Bottom: -11,156 -9,154 110.5,154 107,150.5 107,-10.5 104,-7.5 -13,-7.5 -11.5,-6 -11.5,150 -11,150.5